# Altium PCB PoBoI.PcbDoc (part 1 of 4)
Units mm, origin at the board's own origin, x right, y up, seen from the top; angles counter-clockwise.
Board outline 90.25 x 95.8 mm, 4 copper layers (Top Layer, GND Layer, PWR Layer, Bottom Layer), stack 1.537 mm thick; 250 components, 177 nets, 942 pads, 25 vias.
Unrouted connection lines stored in the file: 192.
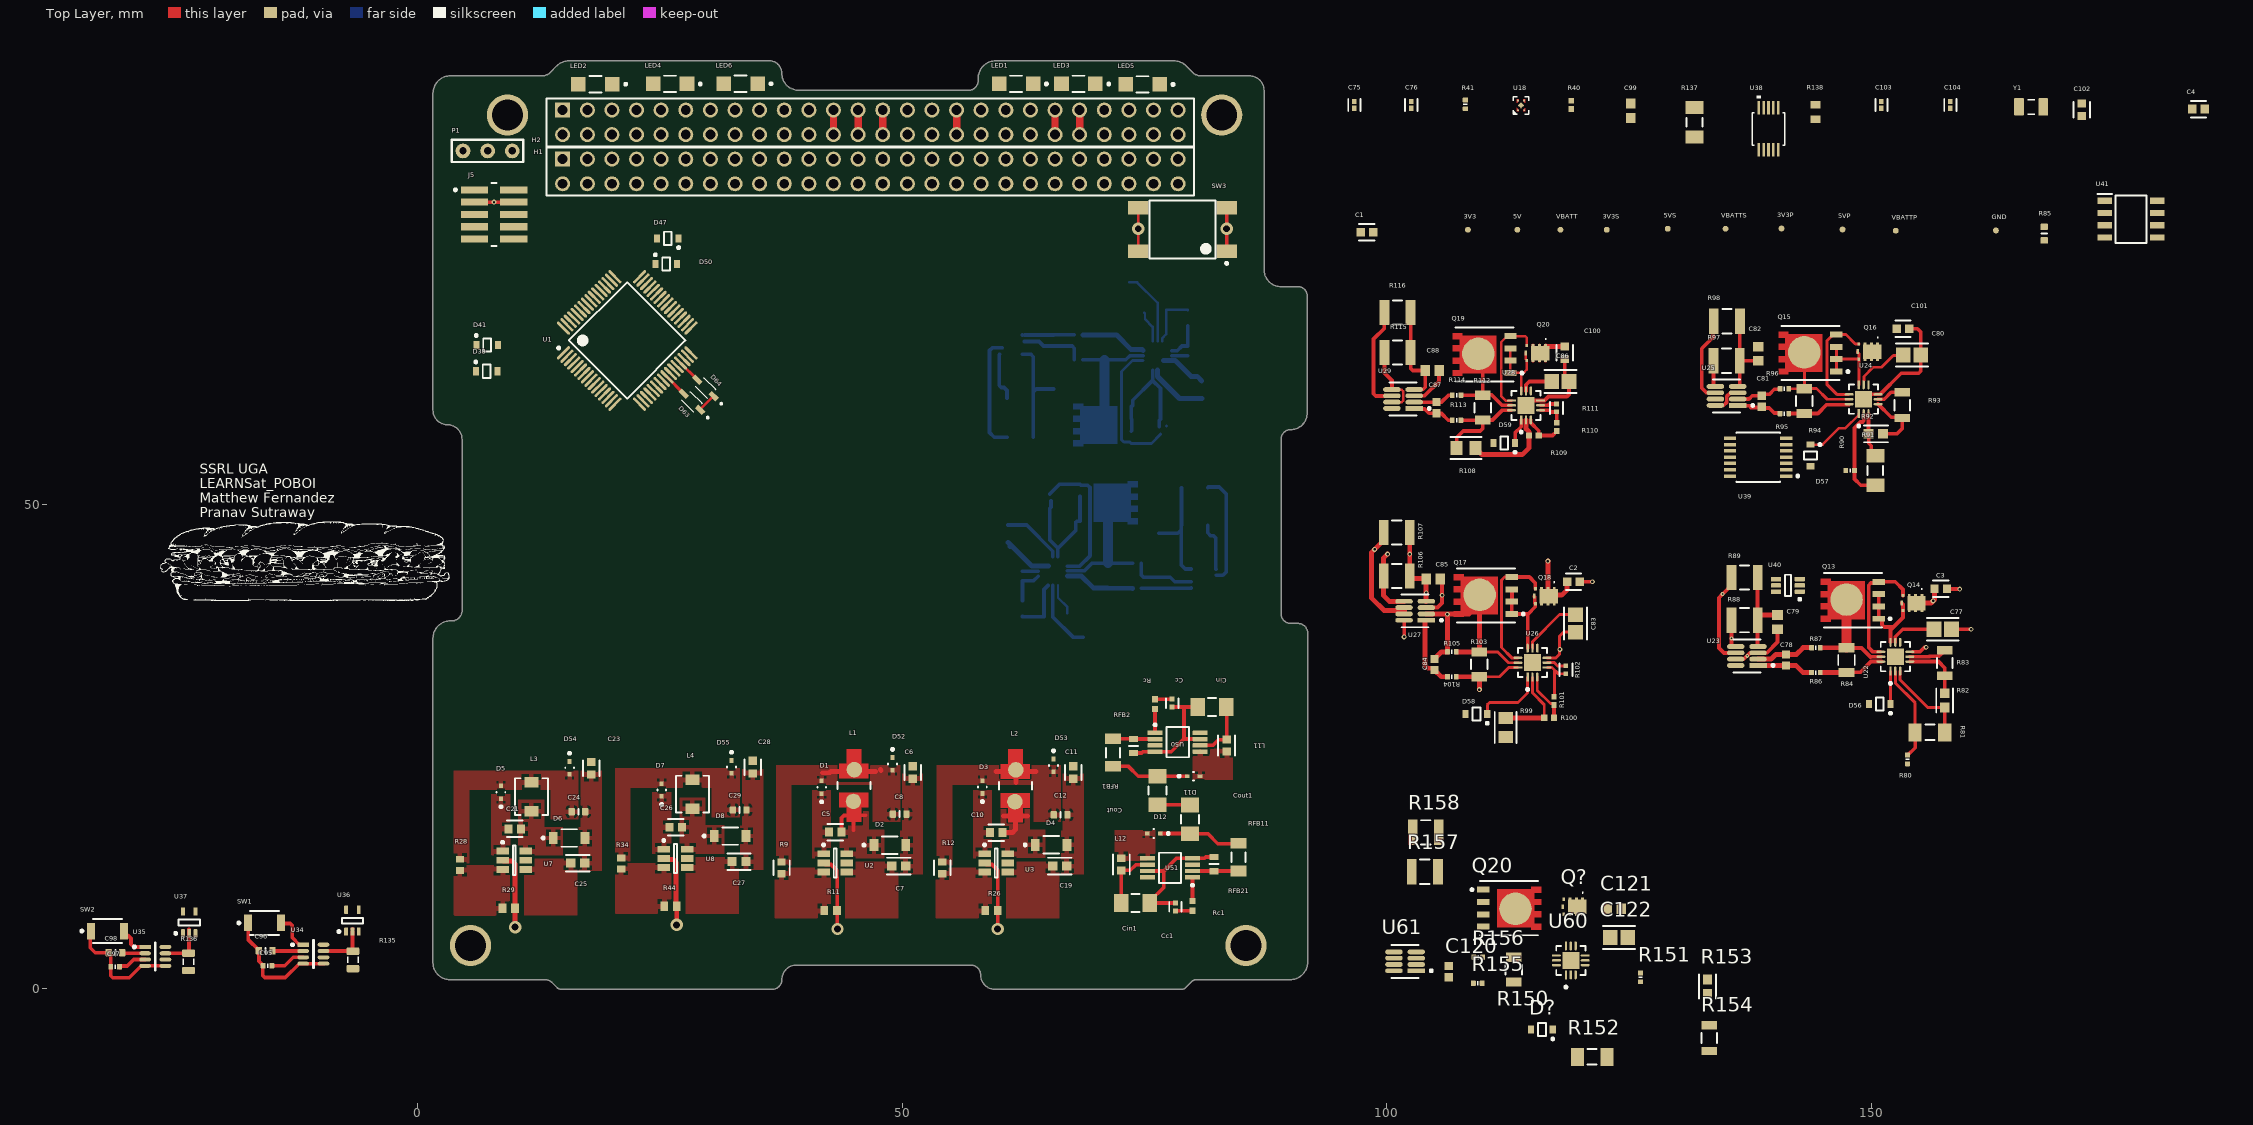
[diagram p0: Top Layer view]
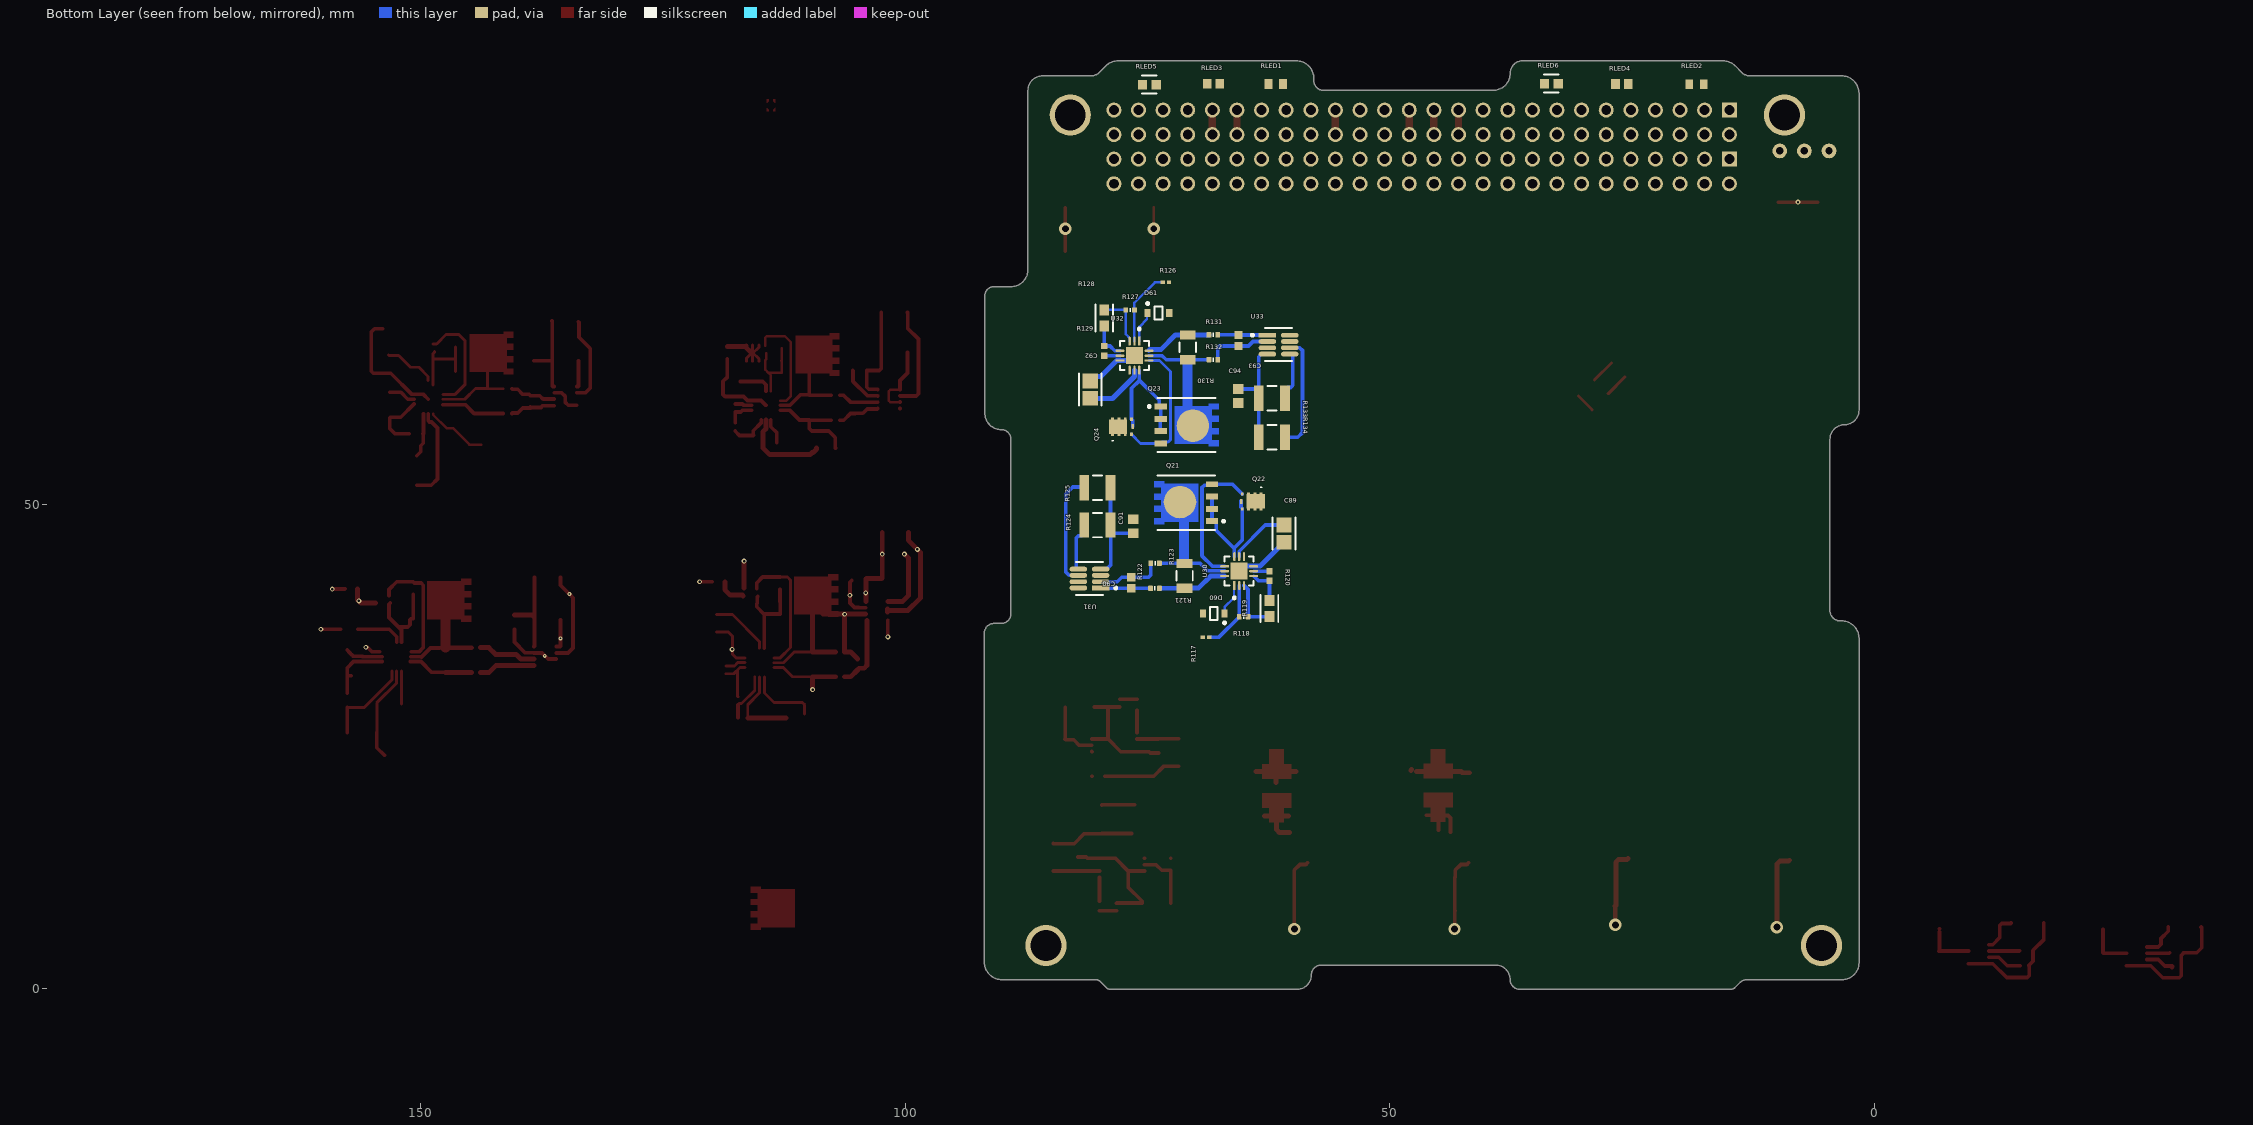
[diagram p1: Bottom Layer view, seen from below]
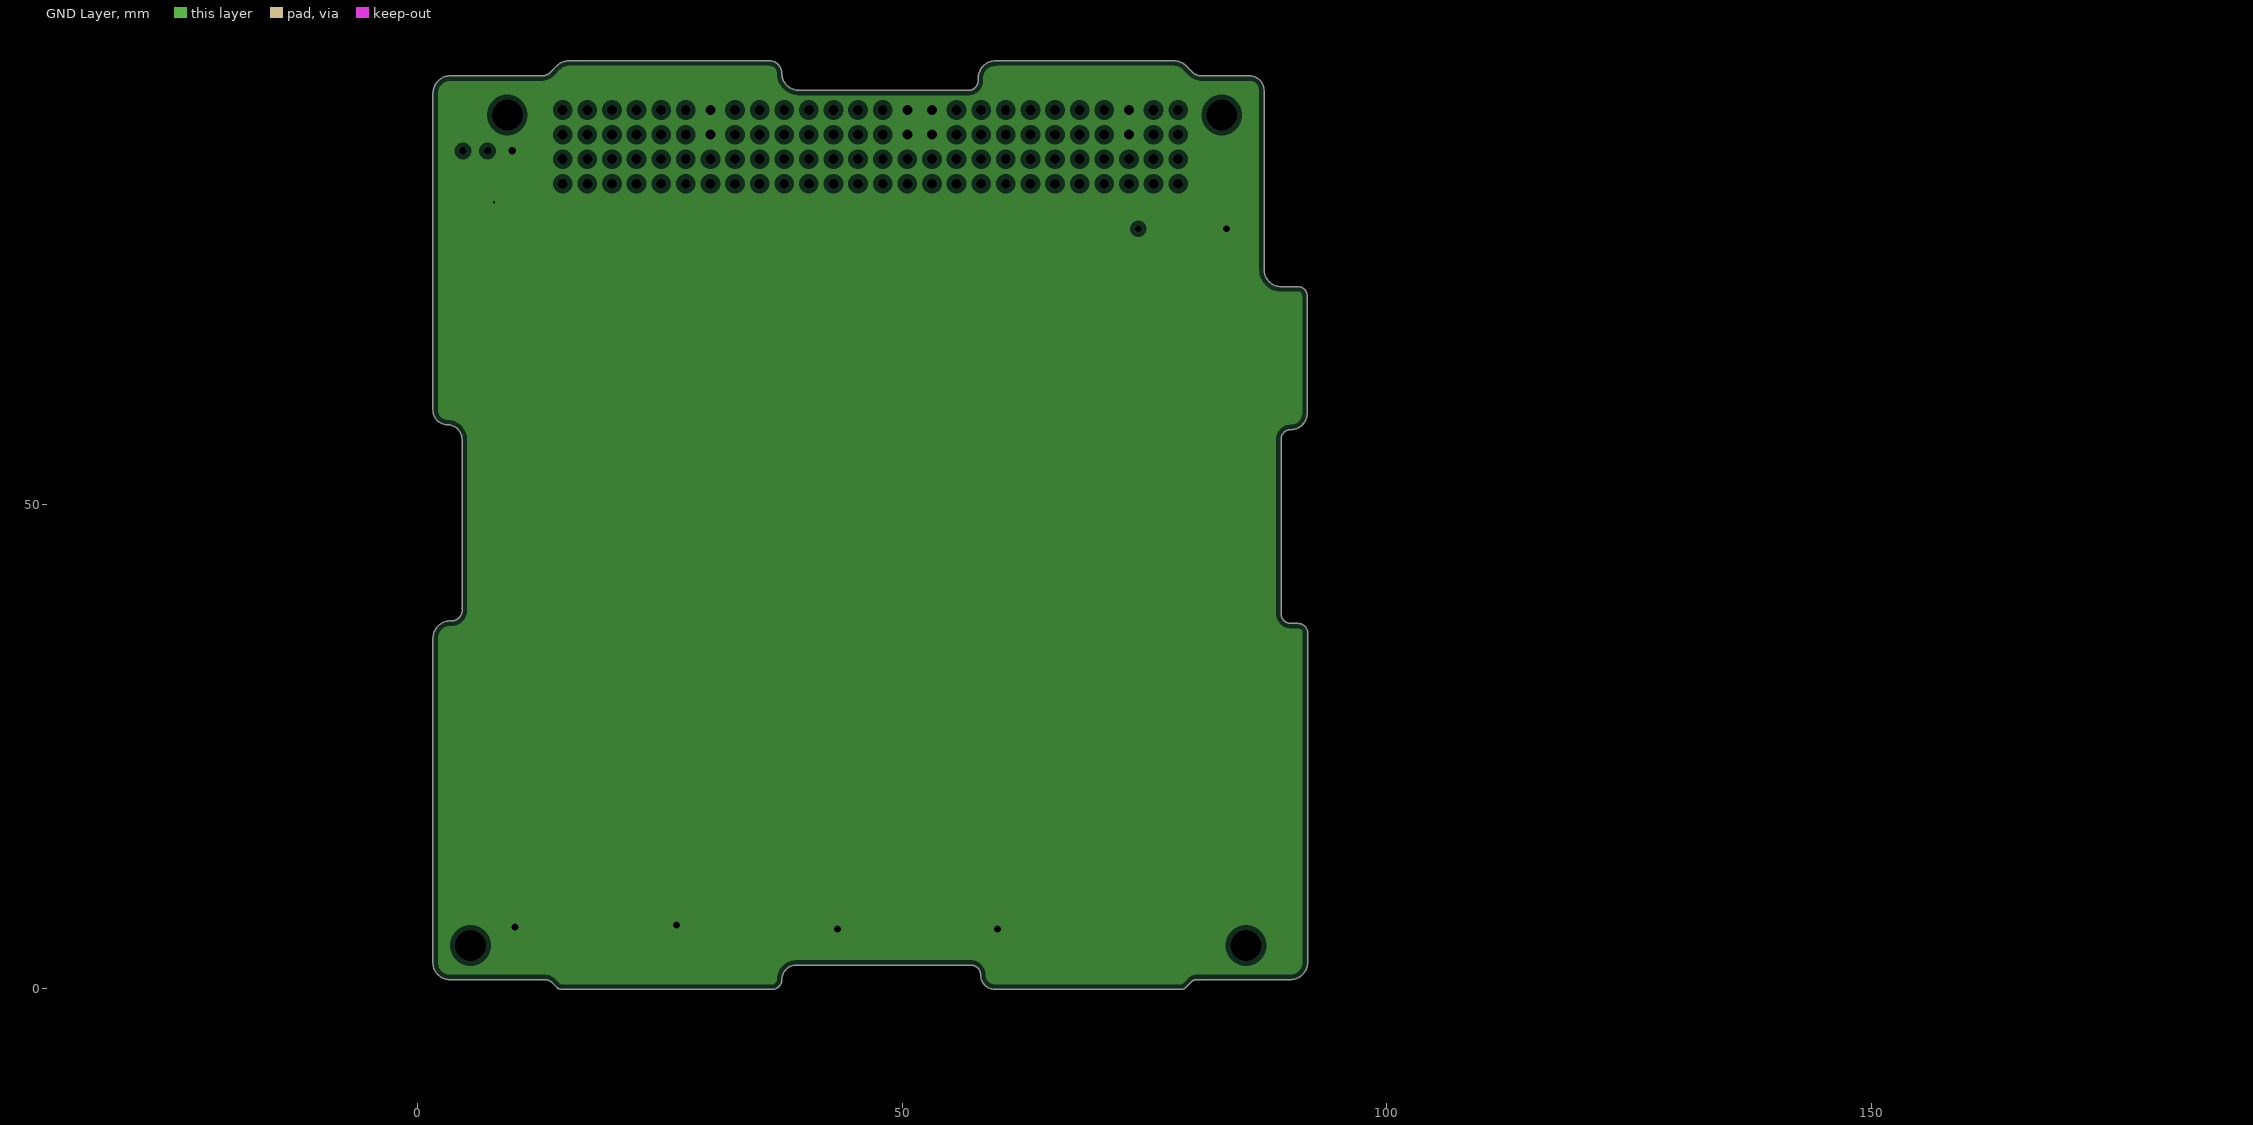
[diagram p2: GND Layer, clearances drawn from the general rule]
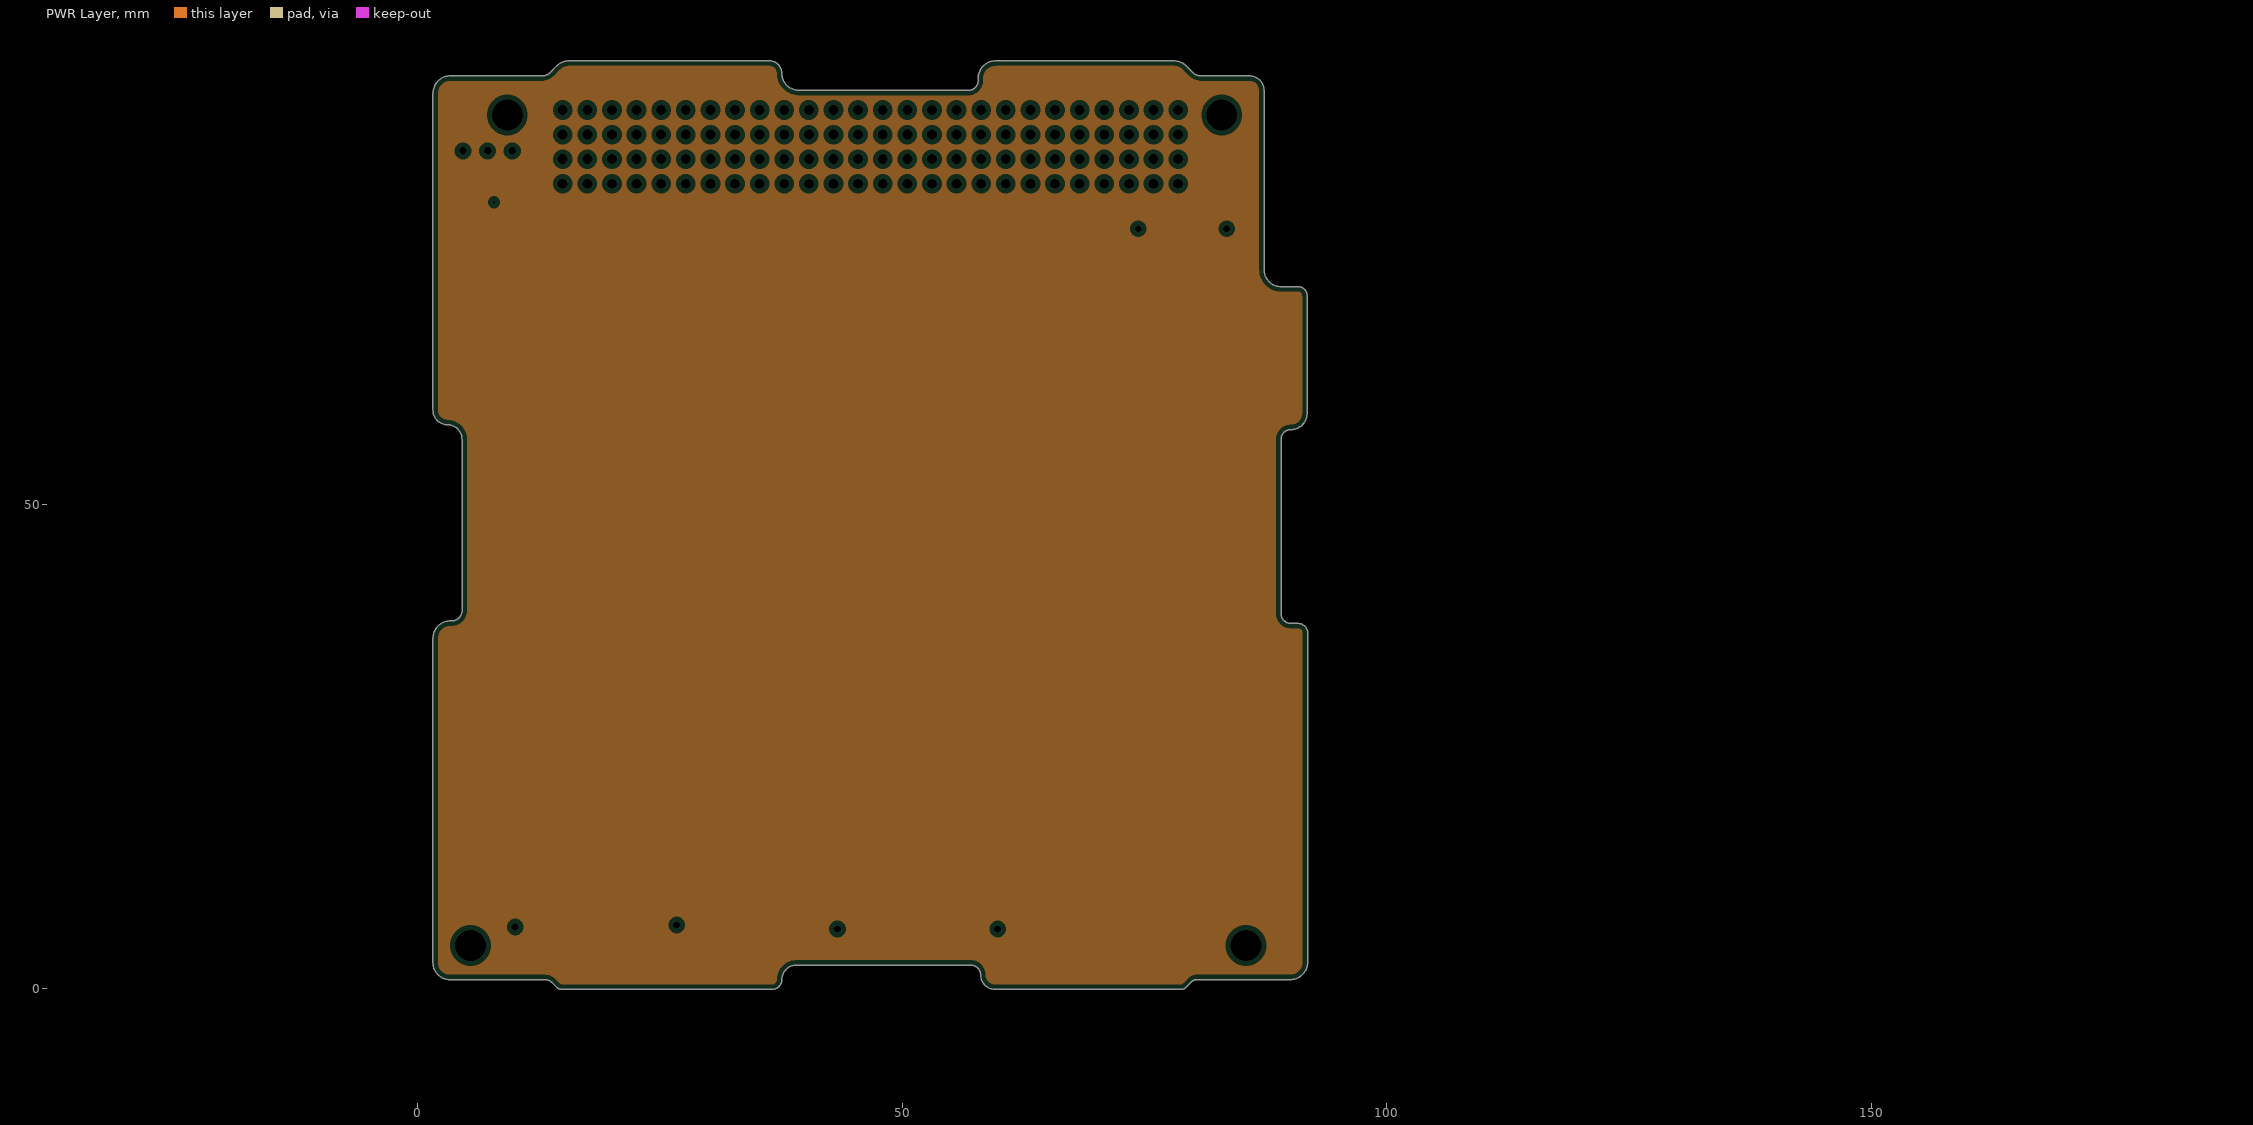
[diagram p3: PWR Layer, clearances drawn from the general rule]

## Layer stack, top to bottom
Top Solder: solder mask 0.0102, Solder Resist, Dk 3.5
Top Layer: signal copper 0.035
Dielectric 2: prepreg 0.1905, PP-006, Dk 4.1
GND Layer: plane copper 0.035, net GND
Dielectric 1: dielectric 1.016, FR-4, Dk 4.8
PWR Layer: plane copper 0.035
Dielectric 3: prepreg 0.1905, PP-006, Dk 4.1
Bottom Layer: signal copper 0.035
Bottom Solder: solder mask 0.0102, Solder Resist, Dk 3.5

## Board outline
1.601,2.709 ccw(c3.351,2.709) 3.351,0.959 13.101,0.959 cw(c13.101,-0.206) 13.925,0.617 14.395,0.148 ccw(c14.851,0.604) 14.851,-0.041 36.601,-0.041 ccw(c36.601,0.959) 37.601,0.959 cw(c39.101,0.959) 39.101,2.459 57.101,2.459 cw(c57.101,1.459) 58.101,1.459 ccw(c59.601,1.459) 59.601,-0.041 78.851,-0.041 ccw(c78.851,0.562) 79.278,0.135 79.925,0.782 cw(c80.351,0.355) 80.351,0.959 90.048,0.959 ccw(c90.048,2.762) 91.851,2.762 91.851,36.709 ccw(c90.851,36.709) 90.851,37.709 90.101,37.709 cw(c90.101,38.709) 89.101,38.709 89.101,56.709 cw(c90.101,56.709) 90.101,57.709 ccw(c90.101,59.409) 91.801,59.409 91.801,71.508 ccw(c90.851,71.508) 90.851,72.459 89.101,72.459 cw(c89.101,74.209) 87.351,74.209 87.351,92.709 ccw(c85.851,92.709) 85.851,94.209 80.851,94.209 cw(c80.851,95.416) 79.998,94.562 79.329,95.231 ccw(c78.054,93.955) 78.054,95.759 76.602,95.759 60.061,95.759 59.655,95.752 ccw(c59.655,93.949) 57.851,93.949 57.851,93.709 cw(c56.851,93.709) 56.851,92.709 39.351,92.709 cw(c39.351,94.459) 37.601,94.459 ccw(c36.301,94.459) 36.301,95.759 15.603,95.759 ccw(c15.604,94.063) 14.404,95.261 13.705,94.562 cw(c12.851,95.416) 12.851,94.209 3.405,94.209 ccw(c3.405,92.405) 1.601,92.405 1.601,59.709 ccw(c3.101,59.709) 3.101,58.209 cw(c3.101,56.709) 4.601,56.709 4.601,39.027 cw(c3.55,39.027) 3.55,37.975 3.405,37.975 ccw(c3.405,36.172) 1.601,36.172

## Design rules (kind name [scope] priority, off if disabled: settings)
BoardOutlineClearance [All] p1: gap=0.2 ignorepadtopadclearanceinfootprint=FALSE except(0.4: Arc-SplitBarrior Arc-SplitContinuation Track-SplitBarrior Track-SplitContinuation SMDPad-SplitBarrior SMDPad-SplitContinuation THPad-SplitBarrior THPad-SplitContinuation Via-SplitBarrior Via-SplitContinuation Fill-SplitBarrior Fill-SplitContinuation Poly-SplitBarrior Poly-SplitContinuation Region-SplitBarrior Region-SplitContinuation Text-SplitBarrior Text-SplitContinuation)
Clearance "Clearance Top Layer" [OnLayer('Top Layer')] p1: gap=0.203 ignorepadtopadclearanceinfootprint=TRUE except(0.254: Arc-Text Track-Text SMDPad-Text THPad-Text Via-Text Fill-Text Poly-Text Region-Text Text-Text)
Clearance "Clearance Bottom Layer" [OnLayer('Bottom Layer')] p2: gap=0.203 ignorepadtopadclearanceinfootprint=TRUE except(0.254: Arc-Text Track-Text SMDPad-Text THPad-Text Via-Text Fill-Text Poly-Text Region-Text Text-Text)
Clearance [All] p3: gap=0.2 ignorepadtopadclearanceinfootprint=FALSE except(0.089: Arc-Arc Arc-Track Arc-SMDPad Track-Track Track-SMDPad SMDPad-SMDPad; 0.127: Arc-Via Track-Via SMDPad-Via THPad-Via Via-Via; 0.254: Arc-Text Track-Text SMDPad-Text THPad-Text Via-Text Fill-Text Poly-Text Region-Text Text-Text)
FanoutControl Fanout_Small [(CompPinCount < 5)] p1: bgadir=Out bgaviamode=Centered fanoutstyle=Auto fanoutdirection=OutThenIn viagrid=0.025 // Fanout_Small (Default Rule)
FanoutControl Fanout_Default [All] p2: bgadir=Out bgaviamode=Centered fanoutstyle=Auto fanoutdirection=Alternating viagrid=0.025 // Fanout_Default (Default Rule)
FanoutControl Fanout_BGA [IsBGA] p3: bgadir=Out bgaviamode=Centered fanoutstyle=Auto fanoutdirection=Alternating viagrid=0.025 // Fanout_BGA (Default Rule)
FanoutControl Fanout_LCC [IsLCC] p4: bgadir=Out bgaviamode=Centered fanoutstyle=Auto fanoutdirection=Alternating viagrid=0.025 // Fanout_LCC (Default Rule)
FanoutControl Fanout_SOIC [IsSOIC] p5: bgadir=Out bgaviamode=Centered fanoutstyle=Auto fanoutdirection=Alternating viagrid=0.025 // Fanout_SOIC (Default Rule)
HoleSize [All] p1: absolutevalues=TRUE maxlimit=6.3 minlimit=0.2 maxpercent=80.000 minpercent=20.000
MinimumAnnularRing [All] p1: minimumring=0.076
MinimumSolderMaskSliver [All] p1: minsoldermaskwidth=0.1
PlaneClearance [All] p1: clearance=0.508
PlaneConnect [All] p1: planeconnectstyle=Relief reliefexpansion=0.508 reliefentries=4 reliefconductorwidth=0.254 reliefairgap=0.254
PolygonConnect PolygonConnect_1 [All] p1: thpad.connectstyle=Relief thpad.reliefconductorwidth=0.508 thpad.reliefentries=4 thpad.polygonreliefangle="90 Angle" thpad.airgapwidth=0.254 smdpad.connectstyle=Relief smdpad.reliefconductorwidth=0.508 smdpad.reliefentries=4 smdpad.polygonreliefangle="90 Angle" smdpad.airgapwidth=0.254 via.connectstyle=Direct via.reliefconductorwidth=0.508 via.reliefentries=4 via.polygonreliefangle="90 Angle" via.airgapwidth=0.254
RoutingCorners [All] p1: cornerstyle=Round minsetback=2.54 maxsetback=2.54
RoutingVias [All] p1: holewidth=0.5 width=1 viastyle="Through Hole" minholewidth=0.2 minwidth=0.45 maxholewidth=1 maxwidth=2
SilkToSilkClearance [All] p1: silktosilkclearance=0.1
SilkToSolderMaskClearance [IsPad] p1: minsilkscreentomaskgap=0.1 clearancetoexposedcopper=TRUE
SolderMaskExpansion [All] p1: expansion=0.102 istentingtop=FALSE
SupplyNets "Schematic Supply Nets" [InNet('GND')] p1: voltage=0.000
Width [All] p1: maxlimit=2.54 minlimit=0.089 preferedwidth=0.381 minimp=50.000000 maximp=50.000000 favimp=50.000000
18 further rules are at their usual default settings.

## Classes and differential pairs
component class 12VPrimary: C120 C121 C122 D? Q20 Q? R150 R151 R152 R153 R154 R155 R156 R157 R158 U60 U61
component class 12V_BOOST: Cc Cc1 Cin Cin1 Cout Cout1 D11 D12 L11 L12 Rc Rc1 RFB1 RFB2 RFB11 RFB21 U50 U51
component class WatchDog: C95 C96 C97 C98 CM4WDRST R135 R136 STMWDRST SW1 SW2 U34 U35 U36 U37
component class VBATTSecondary: C92 C93 C94 D61 Q23 Q24 R126 R127 R128 R129 R130 R131 R132 R133 R134 U32 U33
component class VBATTPrimary: C89 C90 C91 D60 Q21 Q22 R117 R118 R119 R120 R121 R122 R123 R124 R125 U30 U31
component class MemoryLatch: U40
component class 5VSecondary: C80 C81 C82 D57 Q15 Q16 R90 R91 R92 R93 R94 R95 R96 R97 R98 U24 U25
component class 5VPrimary: C77 C78 C79 D56 Q13 Q14 R80 R81 R82 R83 R84 R86 R87 R88 R89 U22 U23
component class 3V3Secondary: C86 C87 C88 D59 Q19 Q20 R108 R109 R110 R111 R112 R113 R114 R115 R116 U28 U29
component class 3V3Primary: C83 C84 C85 D58 Q17 Q18 R99 R100 R101 R102 R103 R104 R105 R106 R107 U26 U27
component class STM32: C2 C3 C4 C75 C76 C99 C100 C101 C102 C103 C104 D63 D64 R40 R41 R85 R137 R138 U1 U18 U38 U39 U41 Y1
component class 3V3_Buck: C21 C23 C24 C25 C26 C27 C28 C29 D5 D6 D7 D8 D54 D55 L3 L4 R28 R29 R34 R44 U7 U8
component class 5V_Buck: C5 C6 C7 C8 C10 C11 C12 C19 D1 D2 D3 D4 D52 D53 L1 L2 R9 R11 R12 R26 U2 U3
component class TVS_Diodes: D38 D41 D47 D50
component class PC104: 3V3 5V C1 GND H1 H2 J5 LED1 LED2 LED3 LED4 LED5 LED6 P1 RLED1 RLED2 RLED3 RLED4 RLED5 RLED6 SW3 VBATT VBATTP VBATTS

## Components (designator, comment, footprint, x,y, rotation, side; value= is the part's Value field where it differs from the comment)
3V3 "TPAD6R" TP06R 108.382,78.334 r90 top
3V3P "TPAD6R" TP06R 140.741,78.461 r90 top
3V3S "TPAD6R" TP06R 122.707,78.334 r90 top
5V "TPAD6R" TP06R 113.487,78.334 r90 top
5VP "TPAD6R" TP06R 147.041,78.359 r90 top
5VS "TPAD6R" TP06R 129.007,78.435 r90 top
C1 "0.1uF" FP-C0603-CJ-MFG#1 97.968,78.08 r0 top value=100nF
C2 "0.1uF" FP-C0603-CJ-MFG#1 119.278,42.012 r0 top value=100nF
C3 "0.1uF" FP-C0603-CJ-MFG#2 157.175,41.275 r0 top value=100nF
C4 "0.1uF" FP-C0603-CJ-MFG#1 183.769,90.78 r0 top value=100nF
C5 "0.1uF" FP-C0603-CJ-MFG#1 43.104,16.18 r0 top value=100nF
C6 "0.1uF" FP-C0603-CJ-MFG#1 51.105,22.327 r270 top value=100nF
C7 "1uF" FP-CL10-IPC_B 49.667,12.675 r0 top
C8 "Capacitor 10µF +/-20% 10V 0603" CAPC0603(1608)100_L 49.759,18.034 r180 top value=10uF
C10 "0.1uF" FP-C0603-CJ-MFG#1 59.715,16.129 r0 top value=100nF
C11 "0.1uF" FP-C0603-CJ-MFG#1 67.666,22.327 r270 top value=100nF
C12 "Capacitor 10µF +/-20% 10V 0603" CAPC0603(1608)100_L 66.37,17.958 r180 top value=10uF
C19 "1uF" FP-CL10-IPC_B 66.269,12.675 r0 top
C21 "0.1uF" FP-C0603-CJ-MFG#1 10.033,16.51 r0 top value=100nF
C23 "0.1uF" FP-C0603-CJ-MFG#1 17.932,22.758 r270 top value=100nF
C24 "Capacitor 10µF +/-20% 10V 0603" CAPC0603(1608)100_L 16.612,18.288 r180 top value=10uF
C25 "1uF" FP-CL10-IPC_B 16.545,12.979 r0 top
C26 "0.1uF" FP-C0603-CJ-MFG#1 26.645,16.688 r0 top value=100nF
C27 "1uF" FP-CL10-IPC_B 33.182,13.132 r0 top
C28 "0.1uF" FP-C0603-CJ-MFG#1 34.595,22.885 r270 top value=100nF
C29 "Capacitor 10µF +/-20% 10V 0603" CAPC0603(1608)100_L 33.249,18.466 r180 top value=10uF
C75 "CC0201KRX5R5BB105" FP-CC0201-BA-IPC_A 96.672,91.211 r90 top value=1µF
C76 "CC0201KRX5R5BB105" FP-CC0201-BA-IPC_A 102.54,91.211 r90 top value=1µF
C77 "C0805C184K5RACTU" FP-C0805C-DN-IPC_A 157.378,37.109 r0 top value=180nF
C78 "Capacitor 1 uF +/- 10% 25 V 0603" CAPC1608X90X40LL10T20 141.202,33.935 r270 top value=1µF
C79 "Capacitor 1uF +/- 10% 16V 0603" CAPC1608X90X35ML15T15 140.335,37.846 r270 top value=1µF
C80 "C0805C184K5RACTU" FP-C0805C-DN-IPC_A 154.215,65.405 r0 top value=180nF
C81 "Capacitor 1 uF +/- 10% 25 V 0603" CAPC1608X90X40LL10T20 138.709,60.63 r270 top value=1µF
C82 "Capacitor 1uF +/- 10% 16V 0603" CAPC1608X90X35ML15T15 138.328,65.532 r90 top value=1µF
C83 "C0805C184K5RACTU" FP-C0805C-DN-IPC_A 119.482,37.719 r270 top value=180nF
C84 "Capacitor 1 uF +/- 10% 25 V 0603" CAPC1608X90X40LL10T20 104.941,33.477 r270 top value=1µF
C85 "Capacitor 1uF +/- 10% 16V 0603" CAPC1608X90X35ML15T15 104.8,42.291 r0 top value=1µF
C86 "C0805C184K5RACTU" FP-C0805C-DN-IPC_A 117.919,62.662 r0 top value=180nF
C87 "Capacitor 1 uF +/- 10% 25 V 0603" CAPC1608X90X40LL10T20 105.156,59.969 r270 top value=1µF
C88 "Capacitor 1uF +/- 10% 16V 0603" CAPC1608X90X35ML15T15 104.699,63.805 r0 top value=1µF
C89 "C0805C184K5RACTU" FP-C0805C-DN-IPC_A 60.935,46.965 r270 bottom value=180nF
C90 "Capacitor 1 uF +/- 10% 25 V 0603" CAPC1608X90X40LL10T20 76.683,41.91 r270 bottom value=1µF
C91 "Capacitor 1uF +/- 10% 16V 0603" CAPC1608X90X35ML15T15 76.479,47.727 r90 bottom value=1µF
C92 "C0805C184K5RACTU" FP-C0805C-DN-IPC_A 80.924,61.824 r90 bottom value=180nF
C93 "Capacitor 1 uF +/- 10% 25 V 0603" CAPC1608X90X40LL10T20 65.634,66.904 r90 bottom value=1µF
C94 "Capacitor 1uF +/- 10% 16V 0603" CAPC1608X90X35ML15T15 65.659,61.175 r270 bottom value=1µF
C95 "Capacitor 2,2µF +/-20% 10V 0402" CAPC0402(1005)60_L -15.469,2.388 r0 top value=2.2µF
C96 "Capacitor 1µF +/-40% 50V 0603" CAPC0603(1608)100_L -15.661,3.937 r180 top value=1µF
C97 "Capacitor 2,2µF +/-20% 10V 0402" CAPC0402(1005)60_L -31.191,2.286 r0 top value=2.2µF
C98 "Capacitor 1µF +/-40% 50V 0603" CAPC0603(1608)100_L -31.166,3.734 r180 top value=1µF
C99 "Capacitor 1 uF +/- 10% 16 V 0603" CAPC1608X94X35NL15T15 125.197,90.602 r90 top value=1µF
C100 "0.1uF" FP-C0603-CJ-MFG#3 118.364,65.634 r270 top value=100nF
C101 "0.1uF" FP-C0603-CJ-MFG#1 153.279,68.123 r0 top value=100nF
C102 "0.1uF" FP-C0603-CJ-MFG#1 171.729,90.703 r90 top value=100nF
C103 "GRM0335C1E100JA01D" FP-GRM033-0_03-IPC_A 151.054,91.211 r90 top
C104 "GRM0335C1E100JA01D" FP-GRM033-0_03-IPC_A 158.166,91.211 r90 top
C120 "Capacitor 1 uF +/- 10% 25 V 0603" CAPC1608X90X40LL10T20 106.401,1.778 r270 top value=1µF
C121 "Capacitor 1uF +/- 10% 16V 0603" CAPC1608X90X35ML15T15 123.495,8.28 r0 top value=1µF
C122 "C0805C184K5RACTU" FP-C0805C-DN-IPC_A 123.977,5.309 r180 top value=180nF
Cc "2.2nF" FP-C0402-BB-MFG 77.876,29.489 r270 top value="2,200 pF"
Cc1 "2.2nF" FP-C0402-BB-MFG 78.207,8.458 r90 top value="2,200 pF"
Cin "22uF" FP-CL31-IPC_A 81.991,29.083 r180 top
Cin1 "22uF" FP-CL31-IPC_A 74.089,8.865 r0 top
Cout "22uF" FP-CL31-IPC_A 76.352,20.472 r270 top
Cout1 "22uF" FP-CL31-IPC_A 79.731,17.501 r90 top
D1 "1N914BWT" FP-502-01-MFG 41.707,20.803 r90 top value=4pF
D2 "MBR0530" FP-425-04-MFG 48.743,14.834 r0 top
D3 "1N914BWT" FP-502-01-MFG 58.293,20.828 r90 top value=4pF
D4 "MBR0530" FP-425-04-MFG 65.38,14.859 r0 top
D5 "1N914BWT" FP-502-01-MFG 8.611,20.295 r90 top value=4pF
D6 "MBR0530" FP-425-04-MFG 15.646,15.57 r0 top
D7 "1N914BWT" FP-502-01-MFG 25.197,20.523 r90 top value=4pF
D8 "MBR0530" FP-425-04-MFG 32.258,15.773 r0 top
D11 "1N914BWT" FP-502-01-MFG 80.086,21.946 r0 top value=4pF
D12 "1N914BWT" FP-502-01-MFG 75.971,16.027 r180 top value=4pF
D38 "MM3Z3V6T1G" ONSC-SOD-323-2-477-02_V 7.137,63.729 r0 top
D41 "MM3Z3V6T1G" ONSC-SOD-323-2-477-02_V 7.188,66.446 r0 top
D47 "MM3Z3V6T1G" ONSC-SOD-323-2-477-02_V 25.832,77.445 r180 top
D50 "MM3Z3V6T1G" ONSC-SOD-323-2-477-02_V 25.657,74.778 r0 top
D52 "1N914BWT" FP-502-01-MFG 49.022,23.216 r270 top value=4pF
D53 "1N914BWT" FP-502-01-MFG 65.634,23.063 r270 top value=4pF
D54 "1N914BWT" FP-502-01-MFG 15.697,22.809 r270 top value=4pF
D55 "1N914BWT" FP-502-01-MFG 32.41,22.911 r270 top value=4pF
D56 "MM3Z3V6T1G" ONSC-SOD-323-2-477-02_V 150.876,29.413 r180 top
D57 "MM3Z3V6T1G" ONSC-SOD-323-2-477-02_V 143.739,55.042 r270 top
D58 "MM3Z3V6T1G" ONSC-SOD-323-2-477-02_V 109.271,28.372 r180 top
D59 "MM3Z3V6T1G" ONSC-SOD-323-2-477-02_V 112.141,56.337 r180 top
D60 "MM3Z3V6T1G" ONSC-SOD-323-2-477-02_V 68.174,38.735 r0 bottom
D61 "MM3Z3V6T1G" ONSC-SOD-323-2-477-02_V 73.891,69.748 r180 bottom
D63 "1N4148WX-TP" 1N4148WX-TP-Footprint-1 28.321,60.579 r135 top
D64 "1N4148WX-TP" 1N4148WX-TP-Footprint-1 29.718,62.008 r135 top
D? "MM3Z3V6T1G" ONSC-SOD-323-2-477-02_V 116.027,-4.191 r180 top
GND "TPAD6R" TP06R 162.865,78.257 r90 top
H1 "SSQ-126-22-G-D" SMTC-SSQ-126-22-X-D 14.986,85.611 r0 top
H2 "SSQ-126-22-G-D" SMTC-SSQ-126-22-X-D 14.986,90.678 r0 top
J5 "FTSH-105-01-L-DV-K-P-TR" FP-FTSH-105-01-L-DV-K-P-T-MFG 7.899,79.905 r270 top
L1 "15uH" FP-LQH43CN_03-MFG 45.034,20.98 r90 top
L2 "15uH" FP-LQH43CN_03-MFG 61.697,20.955 r90 top
L3 "PA4547.103NLT" INDM3532X15N 11.76,19.836 r90 top
L4 "PA4547.103NLT" INDM3532X15N 28.372,20.093 r90 top
L11 "10uH" FP-MLZ1608-IPC_C 83.49,25.121 r270 top
L12 "10uH" FP-MLZ1608-IPC_C 72.619,12.852 r90 top
LED1 "HSMS-C150" FP-HSMS-C150-MFG 61.773,93.37 r180 top
LED2 "HSMS-C150" FP-HSMS-C150-MFG 18.364,93.345 r180 top
LED3 "HSMS-C150" FP-HSMS-C150-MFG 68.202,93.37 r180 top
LED4 "HSMS-C150" FP-HSMS-C150-MFG 26.06,93.37 r180 top
LED5 "HSMS-C150" FP-HSMS-C150-MFG 74.831,93.32 r180 top
LED6 "HSMS-C150" FP-HSMS-C150-MFG 33.35,93.396 r180 top
P1 "22-28-4036" 22-28-4036-Footprint-1 8.128,85.827 r180 top
Q13 "SI7164DP-T1-GE3" Vishay_S17-0173-SINGLE_MFG 148.097,40.099 r180 top
Q14 "SI5418DU-T1-GE3" SI5418DU-T1-GE3-Footprint-1 154.503,39.941 r180 top
Q15 "SI7164DP-T1-GE3" Vishay_S17-0173-SINGLE_MFG 143.739,65.608 r180 top
Q16 "SI5418DU-T1-GE3" SI5418DU-T1-GE3-Footprint-1 149.944,65.888 r180 top
Q17 "SI7164DP-T1-GE3" Vishay_S17-0173-SINGLE_MFG 110.241,40.589 r180 top
Q18 "SI5418DU-T1-GE3" SI5418DU-T1-GE3-Footprint-1 116.57,40.652 r180 top
Q19 "SI7164DP-T1-GE3" Vishay_S17-0173-SINGLE_MFG 110.109,65.456 r180 top
Q20 "SI7164DP-T1-GE3" Vishay_S17-0173-SINGLE_MFG 112.649,8.331 r0 top
Q20 "SI5418DU-T1-GE3" SI5418DU-T1-GE3-Footprint-1 115.688,65.735 r180 top
Q21 "SI7164DP-T1-GE3" Vishay_S17-0173-SINGLE_MFG 71.018,50.165 r0 bottom
Q22 "SI5418DU-T1-GE3" SI5418DU-T1-GE3-Footprint-1 64.008,50.419 r0 bottom
Q23 "SI7164DP-T1-GE3" Vishay_S17-0173-SINGLE_MFG 70.978,58.184 r180 bottom
Q24 "SI5418DU-T1-GE3" SI5418DU-T1-GE3-Footprint-1 77.893,57.887 r180 bottom
Q? "SI5418DU-T1-GE3" SI5418DU-T1-GE3-Footprint-1 119.507,8.611 r180 top
R9 "35.7k" FP-CRCW0603-e3-IPC_C 37.567,12.497 r90 top
R11 "10k" RESC1609X50X30NL8T20 42.632,8.077 r180 top value=1K
R12 "35.7k" FP-CRCW0603-e3-IPC_C 54.153,12.497 r90 top
R26 "10k" RESC1609X50X30NL8T20 59.233,8.077 r180 top value=1K
R28 "22.1k" RESC1609X50X30LL10T20 4.394,12.802 r90 top
R29 "10k" RESC1609X50X30NL8T20 9.423,8.331 r180 top value=1K
R34 "22.1k" RESC1609X50X30LL10T20 21.031,12.945 r90 top
R40 "1.1k" RESC1005X40X25NL05T10 119.05,91.211 r90 top
R41 "3KR2F" RESC0402(1005)_L 108.128,91.262 r90 top value=3k
R44 "10k" RESC1609X50X30NL8T20 26.111,8.534 r180 top value=1K
R80 "768KR2F" RESC0402(1005)_L 153.746,23.673 r90 top value=768k
R81 "CRCW12067K50FKEA" FP-CRCW1206-e3-IPC_A 156.058,26.467 r0 top value=7.5k
R82 "PTN0603E8002BST1" FP-PTN0603-IPC_B 157.582,29.769 r90 top value=80k
R83 "RT1206FRE07150KL" FP-RT1206-IPC_C 157.582,33.63 r90 top value=150k
R84 "CSR1206FK25L0" FP-CSR1206-IPC_C 147.447,33.934 r90 top
R85 "120R3J" RESC0603(1608)_L 167.843,77.927 r90 top value=120
R86 "Resistor 10R  +/-1 % 0402 63 mW" RESC0402(1005)_L 144.297,32.639 r180 top value=10
R87 "Resistor 10R  +/-1 % 0402 63 mW" RESC0402(1005)_L 144.297,35.204 r180 top value=10
R88 "CRCW12103K30JNEA" FP-CRCW1210-e3-IPC_C 136.931,38.049 r180 top value=3.3k
R89 "CRCW12103K30JNEA" FP-CRCW1210-e3-IPC_C 136.931,42.443 r180 top value=3.3k
R90 "768KR2F" RESC0402(1005)_L 147.828,53.492 r0 top value=768k
R91 "CRCW12067K50FKEA" FP-CRCW1206-e3-IPC_A 150.419,53.49 r90 top value=7.5k
R92 "PTN0603E8002BST1" FP-PTN0603-IPC_B 150.47,57.277 r0 top value=80k
R93 "RT1206FRE07150KL" FP-RT1206-IPC_C 153.213,60.223 r90 top value=150k
R94 "CSR1206FK25L0" FP-CSR1206-IPC_C 143.104,60.655 r90 top
R95 "Resistor 10R  +/-1 % 0402 63 mW" RESC0402(1005)_L 141.039,59.36 r180 top value=10
R96 "Resistor 10R  +/-1 % 0402 63 mW" RESC0402(1005)_L 141.046,61.925 r180 top value=10
R97 "CRCW12103K30JNEA" FP-CRCW1210-e3-IPC_C 135.077,64.821 r180 top value=3.3k
R98 "CRCW12103K30JNEA" FP-CRCW1210-e3-IPC_C 135.103,68.885 r180 top value=3.3k
R99 "CR0805-FX-7323ELF" FP-CR0805-IPC_A 112.283,26.976 r90 top value=732k
R100 "Resistor 10k +/-1% 0402 100 mW" RESC1005X40X25ML05T05 116.764,27.965 r0 top value=10k
R101 "RC0402FR-0760K4L" RESC1005X40X25NL05T10 117.272,29.718 r90 top value=60.4k
R102 "ESR01MZPJ224" FP-ESR01-IPC_C 118.491,32.918 r90 top value=220k
R103 "CSR1206FK25L0" FP-CSR1206-IPC_C 109.576,33.477 r90 top
R104 "Resistor 10R  +/-1 % 0402 63 mW" RESC0402(1005)_L 106.731,32.207 r180 top value=10
R105 "Resistor 10R  +/-1 % 0402 63 mW" RESC0402(1005)_L 106.731,34.773 r180 top value=10
R106 "CRCW12103K30JNEA" FP-CRCW1210-e3-IPC_C 101.041,42.596 r180 top value=3.3k
R107 "CRCW12103K30JNEA" FP-CRCW1210-e3-IPC_C 101.041,47.092 r180 top value=3.3k
R108 "CR0805-FX-7323ELF" FP-CR0805-IPC_A 108.179,55.804 r0 top value=732k
R109 "Resistor 10k +/-1% 0402 100 mW" RESC1005X40X25ML05T05 115.197,57.099 r0 top value=10k
R110 "RC0402FR-0760K4L" RESC1005X40X25NL05T10 117.551,57.988 r90 top value=60.4k
R111 "ESR01MZPJ224" FP-ESR01-IPC_C 117.526,59.947 r90 top value=220k
R112 "CSR1206FK25L0" FP-CSR1206-IPC_C 109.931,59.969 r90 top
R113 "Resistor 10R  +/-1 % 0402 63 mW" RESC0402(1005)_L 107.213,58.674 r180 top value=10
R114 "Resistor 10R  +/-1 % 0402 63 mW" RESC0402(1005)_L 107.213,61.265 r180 top value=10
R115 "CRCW12103K30JNEA" FP-CRCW1210-e3-IPC_C 101.122,65.659 r180 top value=3.3k
R116 "CRCW12103K30JNEA" FP-CRCW1210-e3-IPC_C 101.122,69.799 r180 top value=3.3k
R117 "MC0201L6F8663SE" RESC0603X26X15NL03T05 68.986,36.297 r180 bottom value=866k
R118 "2D37KR2F" RESC0402(1005)_L 65.1,38.405 r180 bottom value=2.37k
R119 "CR0603-FX-3742ELF" FP-CR0603-IPC_A 62.433,39.243 r90 bottom value=37.4k
R120 "Resistor 100k +/-1% 0402 100 mW" RESC1005X40X25ML05T05 62.433,42.604 r90 bottom value=100k
R121 "CSR1206FK25L0" FP-CSR1206-IPC_C 71.196,42.621 r90 bottom
R122 "Resistor 10R  +/-1 % 0402 63 mW" RESC0402(1005)_L 74.244,41.326 r0 bottom value=10
R123 "Resistor 10R  +/-1 % 0402 63 mW" RESC0402(1005)_L 74.237,43.917 r0 bottom value=10
R124 "CRCW12103K30JNEA" FP-CRCW1210-e3-IPC_C 80.188,47.854 r0 bottom value=3.3k
R125 "CRCW12103K30JNEA" FP-CRCW1210-e3-IPC_C 80.188,51.714 r0 bottom value=3.3k
R126 "MC0201L6F8663SE" RESC0603X26X15NL03T05 73.127,72.898 r0 bottom value=866k
R127 "2D37KR2F" RESC0402(1005)_L 76.81,70.053 r0 bottom value=2.37k
R128 "CR0603-FX-3742ELF" FP-CR0603-IPC_A 79.477,69.215 r270 bottom value=37.4k
R129 "Resistor 100k +/-1% 0402 100 mW" RESC1005X40X25ML05T05 79.477,65.837 r270 bottom value=100k
R130 "CSR1206FK25L0" FP-CSR1206-IPC_C 70.866,66.192 r270 bottom
R131 "Resistor 10R  +/-1 % 0402 63 mW" RESC0402(1005)_L 68.224,67.488 r180 bottom value=10
R132 "Resistor 10R  +/-1 % 0402 63 mW" RESC0402(1005)_L 68.224,64.922 r180 bottom value=10
R133 "CRCW12103K30JNEA" FP-CRCW1210-e3-IPC_C 62.179,60.935 r180 bottom value=3.3k
R134 "CRCW12103K30JNEA" FP-CRCW1210-e3-IPC_C 62.179,56.921 r180 bottom value=3.3k
R135 "1KR5J" RESC0805(2012)_L -6.655,2.997 r90 top value=1k
R136 "1KR5J" RESC0805(2012)_L -23.622,2.794 r90 top value=1k
R137 "Resistor 100k +/-1% 1206 250 mW" RESC3216X60X45ML15T20 131.75,89.408 r90 top value=100k
R138 "Resistor 10k +/-1% 0603 100 mW" RESC1608X55X25ML10T15 144.247,90.475 r90 top value=10k
R150 "CSR1206FK25L0" FP-CSR1206-IPC_C 113.106,1.981 r90 top
R151 "768KR2F" RESC0402(1005)_L 126.187,1.194 r90 top value=768k
R152 "CRCW12067K50FKEA" FP-CRCW1206-e3-IPC_A 121.209,-7.01 r0 top value=7.5k
R153 "PTN0603E8002BST1" FP-PTN0603-IPC_B 133.096,0.229 r90 top value=80k
R154 "RT1206FRE07150KL" FP-RT1206-IPC_C 133.274,-5.08 r90 top value=150k
R155 "Resistor 10R  +/-1 % 0402 63 mW" RESC0402(1005)_L 109.398,0.584 r180 top value=10
R156 "Resistor 10R  +/-1 % 0402 63 mW" RESC0402(1005)_L 109.449,3.277 r0 top value=10
R157 "CRCW12103K30JNEA" FP-CRCW1210-e3-IPC_C 103.937,12.09 r180 top value=3.3k
R158 "CRCW12103K30JNEA" FP-CRCW1210-e3-IPC_C 104.038,16.154 r180 top value=3.3k
Rc "24kOhms" RESC1005X40X25ML05T05 76.098,29.388 r90 top
Rc1 "24kOhms" RESC1005X40X25ML05T05 79.959,8.56 r270 top
RFB1 "64.9kOhms" RESC3216X70X50NL05T20 71.78,24.384 r270 top
RFB2 "7.5kOhms" FP-ERJ3EK-MFG 73.889,25.07 r270 top
RFB11 "64.9kOhms" RESC3216X70X50NL05T20 84.734,13.589 r90 top
RFB21 "7.5kOhms" FP-ERJ3EK-MFG 82.194,12.878 r90 top
RLED1 "150" RESC1608X55X25ML10T15 61.785,93.37 r0 bottom
RLED2 "150" RESC1608X55X25ML10T15 18.376,93.345 r0 bottom
RLED3 "240" RESC1608X55X30NL20T20 68.199,93.396 r0 bottom
RLED4 "240" RESC1608X55X30NL20T20 26.071,93.37 r0 bottom
RLED5 "430" FP-CRCW0603-e3-IPC_B 74.828,93.294 r0 bottom
RLED6 "430" FP-CRCW0603-e3-IPC_B 33.35,93.396 r0 bottom
SW1 "B3U-1000P" OMRON-B3U-1000_V -15.773,6.807 r0 top
SW2 "B3U-1000P" OMRON-B3U-1000_V -31.977,5.969 r0 top
SW3 "TS04-66-43-BK-100-SMT" SOP127P600-8N 78.943,78.359 r180 top
U1 "STM32F103RET6" STM-LQFP64_N 21.641,66.904 r45 top
U2 "LT1616ES6#TRMPBF" LT-S6-6-SOT-23_M 43.104,13.005 r0 top
U3 "LT1616ES6#TRMPBF" LT-S6-6-SOT-23_M 59.715,13.005 r0 top
U7 "LT1616ES6#TRMPBF" LT-S6-6-SOT-23_M 9.988,13.274 r0 top
U8 "LT1616ES6#TRMPBF" LT-S6-6-SOT-23_M 26.619,13.462 r0 top
U18 "LP5907SNX-3.3" TI-DQN4-480X480TP_V 113.868,91.161 r90 top
U22 "LTC4231IUD-2#TRPBF" FP-UD-12-05-08-1855-IPC_A 152.484,34.273 r90 top
U23 "INA219AIDCNR" FP-DCN0008A-IPC_A 137.167,34.351 r180 top
U24 "LTC4231IUD-2#TRPBF" FP-UD-12-05-08-1855-IPC_A 149.217,60.841 r90 top
U25 "INA219AIDCNR" FP-DCN0008A-IPC_A 135.07,61.183 r180 top
U26 "LTC4231IUD-2#TRPBF" FP-UD-12-05-08-1855-IPC_A 115.045,33.663 r90 top
U27 "INA219AIDCNR" FP-DCN0008A-IPC_A 102.946,39.014 r180 top
U28 "LTC4231IUD-2#TRPBF" FP-UD-12-05-08-1855-IPC_A 114.384,60.206 r90 top
U29 "INA219AIDCNR" FP-DCN0008A-IPC_A 101.694,60.868 r180 top
U30 "LTC4231IUD-2#TRPBF" FP-UD-12-05-08-1855-IPC_A 65.557,43.104 r90 bottom
U31 "INA219AIDCNR" FP-DCN0008A-IPC_A 81.001,42.342 r0 bottom
U32 "LTC4231IUD-2#TRPBF" FP-UD-12-05-08-1855-IPC_A 76.36,65.337 r270 bottom
U33 "INA219AIDCNR" FP-DCN0008A-IPC_A 61.493,66.472 r180 bottom
U34 "MAX6746KA29+T" FP-K8-5-IPC_C -10.744,3.581 r0 top
U35 "MAX6746KA29+T" FP-K8-5-IPC_C -27.051,3.353 r0 top
U36 "SN74AUP1G08QDCKRQ1" DCK0005A_N -6.706,7.036 r90 top
U37 "SN74AUP1G08QDCKRQ1" DCK0005A_N -23.546,6.858 r90 top
U38 "LTC4304CMS#PBF" LTC4304CMS#PBF-Footprint-1 139.395,88.748 r90 top
U39 "74AC14MTCX" FP-948G-MFG 138.324,54.87 r180 top
U40 "SN74LVC1G373DCKR" DCK0006A_M 141.402,41.631 r180 top
U41 "ISL3259EIRZ" ISL3259EIRZ-Footprint-1 171.602,76.124 r0 top
U50 "LM2622MMX-ADJ/NOPB" DGK0008A_M 78.435,25.451 r0 top
U51 "LM2622MMX-ADJ/NOPB" DGK0008A_M 77.648,12.497 r180 top
U60 "LTC4231IUD-2#TRPBF" FP-UD-12-05-08-1855-IPC_A 118.999,2.946 r90 top
U61 "INA219AIDCNR" FP-DCN0008A-IPC_A 101.905,2.845 r180 top
VBATT "TPAD6R" TP06R 117.932,78.334 r90 top
VBATTP "TPAD6R" TP06R 152.527,78.232 r90 top
VBATTS "TPAD6R" TP06R 134.976,78.435 r90 top
Y1 "ABS07-166-32.768KHZ-T" EPSON-FC-135_V 166.497,91.008 r0 top

## Footprints (in the part's own frame and the unit in brackets; to place one, negate y for a bottom-side part, rotate by r counter-clockwise, add the part's x,y. Pads: shape width x height; smd on the part's side, far side on the other; paste and mask are expansions set on the pad)
1N4148WX-TP-Footprint-1 [mm]
  rect 1.05x0.5 smd: 1(-1.185,0) 2(1.185,0)
  silkscreen extent -2.4,-0.62 0.85,0.62, body extent -1.25,-0.64 1.25,0.64, height 1.17
22-28-4036-Footprint-1 [mil]
  round 60 hole 30: 1(-65,-25) 2(35,-25) 3(135,-25)
  silkscreen extent -110,-70 180,20
CAPC0402(1005)60_L [mm] "Chip Capacitor, Body 1.0x0.5mm, Height 0.6mm, IPC High Density"
  rrect25% 0.5x0.55 smd: 1(-0.45,0) 2(0.45,0)
  silkscreen extent 0,-0.2 0,0.2, body extent -0.5,-0.25 0.5,0.25, height 0.6
CAPC0603(1608)100_L [mm] "Chip Capacitor, Body 1.6x0.8mm, Height 1.0mm, IPC High Density"
  rrect25% 0.66x0.76 smd: 1(-0.7,0) 2(0.7,0)
  silkscreen extent 0,-0.3 0,0.3, body extent -0.8,-0.4 0.8,0.4, height 0.95
CAPC1608X90X35ML15T15 [mm] "Chip Capacitor, 2-Leads, Body 1.75x0.95mm, IPC Low Density"
  rect 1x1.1 smd: 1(-0.725,0) 2(0.725,0)
  body extent -0.87,-0.48 0.87,0.48, height 0.9
CAPC1608X90X40LL10T20 [mm] "Chip Capacitor, 2-Leads, Body 1.70x0.90mm, IPC High Density"
  rect 0.85x0.85 smd: 1(-0.575,0) 2(0.575,0)
  body extent -0.85,-0.45 0.85,0.45, height 0.9
CAPC1608X94X35NL15T15 [mm] "Chip Capacitor, 2-Leads, Body 1.75x0.96mm, IPC Medium Density"
  rect 1.05x1 smd: 1(-0.75,0) 2(0.75,0)
  body extent -0.87,-0.48 0.87,0.48, height 0.94
DCK0005A_N [mm] "SOT23, 5-Leads, Body 2.15x1.4mm, Pitch 0.65mm, IPC Medium Density"
  rrect25% 0.85x0.4 smd: 1(-1.125,0.65) 2(-1.125,0) 3(-1.125,-0.65) 4(1.125,-0.65) 5(1.125,0.65)
  silkscreen extent -1.25,-1.1 0.3,1.52, body extent -1.14,-1 1.14,1, height 0.94
DCK0006A_M [mm] "SOT23, 6-Leads, Body 2.15x1.4mm, Pitch 0.65mm, IPC Low Density"
  rrect22% 1.05x0.45 smd: 1(-1.225,0.65) 2(-1.225,0) 3(-1.225,-0.65) 4(1.225,-0.65) 5(1.225,0) 6(1.225,0.65)
  silkscreen extent -1.35,-1.1 0.3,1.55, body extent -1.14,-1 1.14,1, height 0.94
DGK0008A_M [mm] "TSOP, 8-Leads, Body 3.1x3.1mm, Pitch 0.65mm, IPC Low Density"
  rrect22% 1.55x0.45 smd: 1(-2.325,0.975) 2(-2.325,0.325) 3(-2.325,-0.325) 4(-2.325,-0.975) 5(2.325,-0.975) 6(2.325,-0.325) 7(2.325,0.325) 8(2.325,0.975)
  silkscreen extent -2.45,-1.55 1.15,1.92, body extent -2.45,-1.5 2.45,1.5, height 0.94
EPSON-FC-135_V [mm] "SMD, 2-Leads, Body 3.2x1.5mm"
  rrect20% 1x1.8 smd: 1(-1.25,0) 2(1.25,0)
  silkscreen extent -0.35,-0.75 0.35,0.75, body extent -1.6,-0.75 1.6,0.75, height 0.9
FP-425-04-MFG [mil]
  rect 36x48 smd paste+0 mask+0: 1(-64.5,0) 2(64.5,0)
  silkscreen extent -110,-35 32,35, body extent -86,-39 86,39, height 10
FP-502-01-MFG [mm]
  rect 0.48x0.4 smd paste+0 mask+0: 1(-0.66,0) 2(0.66,0)
  silkscreen extent -1.62,-0.45 0.05,0.45, body extent -1,-0.55 1,0.55, height 0.25
FP-948G-MFG [mm]
  rect 1.26x0.36 smd paste+0 mask+0: 1(-2.9,1.95) 2(-2.9,1.3) 3(-2.9,0.65) 4(-2.9,0) 5(-2.9,-0.65) 6(-2.9,-1.3) 7(-2.9,-1.95) 8(2.9,-1.95) 9(2.9,-1.3) 10(2.9,-0.65) 11(2.9,0) 12(2.9,0.65) 13(2.9,1.3) 14(2.9,1.95)
  silkscreen extent -4.23,-2.55 2.25,2.55, body extent -3.63,-2.8 3.63,2.8, height 0.25
FP-C0402-BB-MFG [mm]
  rect 0.52x0.52 smd paste+0 mask+0: 1(-0.4,0) 2(0.4,0)
  silkscreen extent -0.5,-0.64 0.5,0.64, body extent -0.8,-0.4 0.8,0.4, height 0.25
FP-C0603-CJ-MFG#1 [mm]
  rect 0.85x0.9 smd paste+0 mask+0: 1(-0.65,0) 2(0.65,0)
  silkscreen extent -0.8,-0.85 0.8,0.85, body extent -1.2,-0.6 1.2,0.6, height 0.25
FP-C0603-CJ-MFG#2 [mm]
  rect 0.85x0.9 smd paste+0 mask+0: 2(0.65,0) 5V_Primary(-0.65,0)
  silkscreen extent -0.8,-0.85 0.8,0.85, body extent -1.2,-0.6 1.2,0.6, height 0.25
FP-C0603-CJ-MFG#3 [mm]
  rect 0.85x0.9 smd paste+0 mask+0: 2(0.65,0) ""(-0.65,0)
  silkscreen extent -0.8,-0.85 0.8,0.85, body extent -1.2,-0.6 1.2,0.6, height 0.25
FP-C0805C-DN-IPC_A [mm]
  rect 1.505x1.556 smd paste+0 mask+0: 1(-0.901,0) 2(0.901,0)
  silkscreen extent -1.65,-1.18 1.65,1.18, body extent -2.15,-1.28 2.15,1.28, height 0.25
FP-CC0201-BA-IPC_A [mm]
  rect 0.554x0.463 smd paste+0 mask+0: 1(-0.354,0) 2(0.354,0)
  silkscreen extent -0.63,-0.63 0.63,0.63, body extent -0.83,-0.43 0.83,0.43, height 0.25
FP-CL10-IPC_B [mm]
  rect 0.958x0.912 smd paste+0 mask+0: 1(-0.727,0) 2(0.727,0)
  silkscreen extent -1.21,-0.86 1.21,0.86, body extent -1.46,-0.71 1.46,0.71, height 0.25
FP-CL31-IPC_A [mm]
  rect 1.505x1.858 smd paste+0 mask+0: 1(-1.476,0) 2(1.476,0)
  silkscreen extent -0.42,-0.93 0.42,0.93, body extent -2.73,-1.43 2.73,1.43, height 0.25
FP-CR0603-IPC_A [mm]
  rect 1.158x1.012 smd paste+0 mask+0: 1(-0.827,0) 2(0.827,0)
  silkscreen extent -1.41,-0.91 1.41,0.91, body extent -0.8,-0.4 0.8,0.4, height 0.55
FP-CR0805-IPC_A [mm]
  rect 1.258x1.462 smd paste+0 mask+0: 1(-0.977,0) 2(0.977,0)
  silkscreen extent -1.61,-1.13 1.61,1.13, body extent -2.11,-1.23 2.11,1.23, height 0.25
FP-CRCW0603-e3-IPC_B [mm]
  rect 0.935x0.962 smd paste+0 mask+0: 1(-0.715,0) 2(0.715,0)
  silkscreen extent -0.75,-0.95 0.75,0.9, body extent -0.77,-0.43 0.77,0.43, height 0.5
FP-CRCW0603-e3-IPC_C [mm]
  rect 0.735x0.862 smd paste+0 mask+0: 1(-0.615,0) 2(0.615,0)
  silkscreen extent -0.75,-0.85 0.75,0.85, body extent -1.08,-0.58 1.08,0.58, height 0.25
FP-CRCW1206-e3-IPC_A [mm]
  rect 1.356x1.858 smd paste+0 mask+0: 1(-1.526,0) 2(1.526,0)
  silkscreen extent -0.47,-0.8 0.47,0.8, body extent -2.7,-1.43 2.7,1.43, height 0.25
FP-CRCW1210-e3-IPC_C [mm]
  rect 1.005x2.606 smd paste+0 mask+0: 1(-1.351,0) 2(1.351,0)
  silkscreen extent -0.47,-1.25 0.47,1.25, body extent -1.95,-1.45 1.95,1.45, height 0.25
FP-CSR1206-IPC_C [mm]
  rect 0.956x1.608 smd paste+0 mask+0: 1(-1.276,0) 2(1.276,0)
  silkscreen extent -0.5,-0.85 0.5,0.85, body extent -1.85,-0.95 1.85,0.95, height 0.25
FP-DCN0008A-IPC_A [mm]
  rect 1.805x0.495 smd paste+0 mask+0: 1(-1.15,0.975)
  rrect100% 1.805x0.495 smd paste+0 mask+0: 2(-1.15,0.325) 3(-1.15,-0.325) 4(-1.15,-0.975) 5(1.15,-0.975) 6(1.15,-0.325) 7(1.15,0.325) 8(1.15,0.975)
  silkscreen extent -2.83,-1.7 1.4,1.7, body extent -2.55,-1.95 2.55,1.95, height 0.25
FP-ERJ3EK-MFG [mm]
  rect 0.65x0.9 smd paste+0 mask+0: 1(-0.725,0) 2(0.725,0)
  silkscreen extent 0,-0.48 0,0.48, body extent -1.15,-0.58 1.15,0.58, height 0.25
FP-ESR01-IPC_C [mm]
  rect 0.466x0.472 smd paste+0 mask+0: 1(-0.403,0) 2(0.403,0)
  silkscreen extent -0.64,-0.67 0.64,0.67, body extent -0.74,-0.38 0.74,0.38, height 0.25
FP-FTSH-105-01-L-DV-K-P-T-MFG [mm]
  rect 0.74x2.79 smd paste+0 mask+0: 1(-2.54,-2.035) 2(-2.54,2.035) 3(-1.27,-2.035) 4(-1.27,2.035) 5(0,-2.035) 6(0,2.035) 7(1.27,-2.035) 8(1.27,2.035) 9(2.54,-2.035) 10(2.54,2.035)
  silkscreen extent -3.24,-4.11 3.24,0.27, body extent -3.34,-3.53 3.34,3.53, height 0.25
FP-GRM033-0_03-IPC_A [mm]
  rect 0.554x0.463 smd paste+0 mask+0: 1(-0.354,0) 2(0.354,0)
  silkscreen extent -0.63,-0.63 0.63,0.63, body extent -0.83,-0.43 0.83,0.43, height 0.25
FP-HSMS-C150-MFG [mm]
  rect 1.5x1.5 smd paste+0 mask+0: 1(-1.75,0) 2(1.75,0)
  silkscreen extent -3.25,-0.85 0.62,0.85, body extent -2.6,-0.95 2.6,0.95, height 0.25
FP-K8-5-IPC_C [mm]
  rect 1.205x0.415 smd paste+0 mask+0: 1(-1.05,0.975)
  rrect100% 1.205x0.415 smd paste+0 mask+0: 2(-1.05,0.325) 3(-1.05,-0.325) 4(-1.05,-0.975) 5(1.05,-0.975) 6(1.05,-0.325) 7(1.05,0.325) 8(1.05,0.975)
  silkscreen extent -2.28,-1.45 0.05,1.45, body extent -1.75,-1.55 1.75,1.55, height 0.25
FP-LQH43CN_03-MFG [mm]
  round 1.603 smd paste+0 mask+0: 1(-1.641,0.047) 2(1.641,-0.047)
  Top Layer region: 3.75,0.75 2.25,0.75 2.25,1.5 0.75,1.5 0.75,-1.5 2.25,-1.5 2.25,-0.75 3.75,-0.75 3.75,0.75
  Top Layer region: -3.75,0.75 -2.25,0.75 -2.25,1.5 -0.75,1.5 -0.75,-1.5 -2.25,-1.5 -2.25,-0.75 -3.75,-0.75 -3.75,0.75
  silkscreen extent -0.38,-1.7 0.38,1.7, body extent -3.85,-1.8 3.85,1.8, height 0.25
FP-MLZ1608-IPC_C [mm]
  rect 0.806x0.858 smd paste+0 mask+0: 1(-0.626,0) 2(0.626,0)
  silkscreen extent -1.03,-0.87 1.03,0.87, body extent -1.13,-0.58 1.13,0.58, height 0.25
FP-PTN0603-IPC_B [mm]
  rect 1.017x0.949 smd paste+0 mask+0: 1(-0.735,0) 2(0.735,0)
  silkscreen extent -1.24,-0.87 1.24,0.87, body extent -1.49,-0.72 1.49,0.72, height 0.25
FP-RT1206-IPC_C [mm]
  rect 0.858x1.612 smd paste+0 mask+0: 1(-1.327,0) 2(1.327,0)
  silkscreen extent -0.52,-0.8 0.52,0.8, body extent -1.86,-0.95 1.86,0.95, height 0.25
FP-UD-12-05-08-1855-IPC_A [mm]
  rect 0.931x0.242 smd paste+0 mask+0: 1(-1.491,0.5)
  rrect100% 0.931x0.242 smd paste+0 mask+0: 2(-1.491,0) 3(-1.491,-0.5) 7(1.491,-0.5) 8(1.491,0) 9(1.491,0.5)
  rrect100% 0.242x0.931 smd paste+0 mask+0: 4(-0.5,-1.491) 5(0,-1.491) 6(0.5,-1.491) 10(0.5,1.491) 11(0,1.491) 12(-0.5,1.491)
  rect 1.75x1.75 smd paste-1000 mask+0: 13(0,0)
  silkscreen extent -2.88,-1.5 1.5,1.5, body extent -2.46,-2.46 2.46,2.46, height 0.25
INDM3532X15N [mm] "Molded Inductor, 2-Leads, Body 3.50x3.20mm, IPC Medium Density"
  rect 1.1x1.45 smd: 1(-1.5,0) 2(1.5,0)
  silkscreen extent -1.9,-1.7 1.9,1.7, body extent -1.9,-1.7 1.9,1.7, height 1.5
ISL3259EIRZ-Footprint-1 [mm]
  rect 1.525x0.65 smd: 1(2.495,5.207) 2(2.495,3.937) 3(2.495,2.667) 4(2.495,1.397) 5(7.919,1.397) 6(7.919,2.667) 7(7.919,3.937) 8(7.919,5.207)
  silkscreen extent 1.73,0.85 6.81,5.88, body extent 2.21,0.85 8.21,5.75, height 1.75
LT-S6-6-SOT-23_M [mm] "SOT23, 6-Leads, Body 3x1.75mm, Pitch 0.95mm, IPC Low Density"
  rect 1.3x0.7 smd: 1(-1.2,0.95) 2(-1.2,0) 3(-1.2,-0.95) 4(1.2,-0.95) 5(1.2,0) 6(1.2,0.95)
  silkscreen extent -1.32,-1.5 0.15,1.97, body extent -0.87,-1.5 0.87,1.5, height 1.45
LTC4304CMS#PBF-Footprint-1 [mil]
  rect 55x11 smd: 1(-86,39.4) 2(-86,19.7) 3(-86,0) 4(-86,-19.7) 5(-86,-39.4) 6(86,-39.4) 7(86,-19.7) 8(86,0) 9(86,19.7) 10(86,39.4)
  silkscreen extent -66,-66 134,66
OMRON-B3U-1000_V [mm] "SMD, 2-Leads, Body 3x2.5mm"
  rect 0.8x1.7 smd: 1(-1.7,0) 2(1.7,0)
  silkscreen extent -2.77,-1.25 1.5,1.25, body extent -1.5,-1.25 1.5,1.25, height 1.75
ONSC-SOD-323-2-477-02_V [mm] "SOD, 2-Leads, Body 1.7x1.25mm"
  rect 0.63x0.83 smd: 1(-1.115,0) 2(1.115,0)
  silkscreen extent -1.24,-0.67 0.4,1.09, body extent -0.85,-0.63 0.85,0.63, height 1.06
RESC0402(1005)_L [mm] "Chip Resistor, Body 1.0x0.5mm, IPC High Density"
  rrect25% 0.5x0.55 smd: 1(-0.45,0) 2(0.45,0)
  silkscreen extent 0,-0.2 0,0.2, body extent -0.5,-0.25 0.5,0.25, height 0.3
RESC0603(1608)_L [mm] "Chip Resistor, Body 1.6x0.8mm, IPC High Density"
  rrect25% 0.66x0.76 smd: 1(-0.7,0) 2(0.7,0)
  silkscreen extent 0,-0.3 0,0.3, body extent -0.8,-0.4 0.8,0.4, height 0.45
RESC0603X26X15NL03T05 [mm] "Chip Resistor, 2-Leads, Body 0.60x0.30mm, IPC Medium Density"
  rect 0.45x0.35 smd: 1(-0.325,0) 2(0.325,0)
  body extent -0.32,-0.16 0.32,0.17, height 0.26
RESC0805(2012)_L [mm] "Chip Resistor, Body 2.0x1.3mm, IPC High Density"
  rrect25% 0.76x1.3 smd: 1(-0.9,0) 2(0.89,0)
  silkscreen extent -0.3,-0.55 0.3,0.55, body extent -1,-0.62 1,0.63, height 0.6
RESC1005X40X25ML05T05 [mm] "Chip Resistor, 2-Leads, Body 1.05x0.55mm, IPC Low Density"
  rect 0.65x0.65 smd: 1(-0.5,0) 2(0.5,0)
  body extent -0.53,-0.28 0.53,0.28, height 0.4
RESC1005X40X25NL05T10 [mm] "Chip Resistor, 2-Leads, Body 1.00x0.50mm, IPC Medium Density"
  rect 0.6x0.55 smd: 1(-0.425,0) 2(0.425,0)
  body extent -0.53,-0.27 0.53,0.28, height 0.4
RESC1608X55X25ML10T15 [mm] "Chip Resistor, 2-Leads, Body 1.70x0.90mm, IPC Low Density"
  rect 0.8x1 smd: 1(-0.75,0) 2(0.75,0)
  body extent -0.85,-0.45 0.85,0.45, height 0.55
RESC1608X55X30NL20T20 [mm] "Chip Resistor, 2-Leads, Body 1.60x0.80mm, IPC Medium Density"
  rect 0.9x1 smd: 1(-0.65,0) 2(0.65,0)
  body extent -0.9,-0.5 0.9,0.5, height 0.55
RESC1609X50X30LL10T20 [mm] "Chip Resistor, 2-Leads, Body 1.55x0.85mm, IPC High Density"
  rect 0.7x0.85 smd: 1(-0.575,0) 2(0.575,0)
  body extent -0.82,-0.48 0.82,0.48, height 0.5
RESC1609X50X30NL8T20 [mm] "Chip Resistor, 2-Leads, Body 1.65x0.95mm, IPC Medium Density"
  rect 0.8x0.95 smd: 1(-0.65,0) 2(0.65,0)
  body extent -0.82,-0.48 0.82,0.48, height 0.5
RESC3216X60X45ML15T20 [mm] "Chip Resistor, 2-Leads, Body 3.3x1.75mm, IPC Low Density"
  rect 1.35x1.85 smd: 1(-1.525,0) 2(1.525,0)
  silkscreen extent -0.45,-0.82 0.45,0.82, body extent -1.65,-0.87 1.65,0.87, height 0.6
RESC3216X70X50NL05T20 [mm] "Chip Resistor, 2-Leads, Body 3.20x1.60mm, IPC Medium Density"
  rect 1.1x1.65 smd: 1(-1.425,0) 2(1.425,0)
  silkscreen extent -0.5,-0.72 0.5,0.72, body extent -1.63,-0.82 1.62,0.82, height 0.7
SI5418DU-T1-GE3-Footprint-1 [mm]
  rect 0.3x0.2 smd: 1(-0.721,-0.723) 2(-0.071,-0.723) 3(0.579,-0.723) 6(0.579,0.977) 7(-0.071,0.977) 8(-0.721,0.977)
  rect 0.3x0.35 smd: 4(1.229,-0.648) 5(1.229,0.902)
  rect 0.25x0.5 smd: 9(1.354,0.127)
  rect 1.87x1.5 smd: 10(-0.161,0.127)
  silkscreen extent -0.77,-1.37 -0.67,-1.27
SMTC-SSQ-126-22-X-D [mm] "SQ Post Socket, 2x26 Pins, Vertical, 2.54mm Pitch, Female"
  rect 1.55x1.55 hole 1.02: 1(0,0)
  round 1.55 hole 1.02: 2(0,-2.54) 3(2.54,0) 4(2.54,-2.54) 5(5.08,0) 6(5.08,-2.54) 7(7.62,0) 8(7.62,-2.54) 9(10.16,0) 10(10.16,-2.54) 11(12.7,0) 12(12.7,-2.54) 13(15.24,0) 14(15.24,-2.54) 15(17.78,0) 16(17.78,-2.54) 17(20.32,0) 18(20.32,-2.54) 19(22.86,0) 20(22.86,-2.54) 21(25.4,0) 22(25.4,-2.54) 23(27.94,0) 24(27.94,-2.54) 25(30.48,0) 26(30.48,-2.54) 27(33.02,0) 28(33.02,-2.54) 29(35.56,0) 30(35.56,-2.54) 31(38.1,0) 32(38.1,-2.54) 33(40.64,0) 34(40.64,-2.54) 35(43.18,0) 36(43.18,-2.54) 37(45.72,0) 38(45.72,-2.54) 39(48.26,0) 40(48.26,-2.54) 41(50.8,0) 42(50.8,-2.54) 43(53.34,0) 44(53.34,-2.54) 45(55.88,0) 46(55.88,-2.54) 47(58.42,0) 48(58.42,-2.54) 49(60.96,0) 50(60.96,-2.54) 51(63.5,0) 52(63.5,-2.54)
  silkscreen extent -1.65,-3.74 65.15,1.21, body extent -1.52,-3.75 65.02,1.21, height 8.51
SOP127P600-8N [mm]
  rect 2.1x1.4 smd: 1(-4.55,2.25) 2(-4.55,-2.25) 3(4.572,2.25) 4(4.572,-2.25)
  silkscreen extent -4.68,-3 3.4,3.62, body extent -3,-3 3,3, height 3.5
STM-LQFP64_N [mm] "Thin QFP, 64-Leads, Body 10x10mm, Pitch 0.5mm, IPC Medium Density"
  oval 1.8x0.3 smd: 1(-5.55,3.75) 2(-5.55,3.25) 3(-5.55,2.75) 4(-5.55,2.25) 5(-5.55,1.75) 6(-5.55,1.25) 7(-5.55,0.75) 8(-5.55,0.25) 9(-5.55,-0.25) 10(-5.55,-0.75) 11(-5.55,-1.25) 12(-5.55,-1.75) 13(-5.55,-2.25) 14(-5.55,-2.75) 15(-5.55,-3.25) 16(-5.55,-3.75) 33(5.55,-3.75) 34(5.55,-3.25) 35(5.55,-2.75) 36(5.55,-2.25) 37(5.55,-1.75) 38(5.55,-1.25) 39(5.55,-0.75) 40(5.55,-0.25) 41(5.55,0.25) 42(5.55,0.75) 43(5.55,1.25) 44(5.55,1.75) 45(5.55,2.25) 46(5.55,2.75) 47(5.55,3.25) 48(5.55,3.75)
  oval 0.3x1.8 smd: 17(-3.75,-5.55) 18(-3.25,-5.55) 19(-2.75,-5.55) 20(-2.25,-5.55) 21(-1.75,-5.55) 22(-1.25,-5.55) 23(-0.75,-5.55) 24(-0.25,-5.55) 25(0.25,-5.55) 26(0.75,-5.55) 27(1.25,-5.55) 28(1.75,-5.55) 29(2.25,-5.55) 30(2.75,-5.55) 31(3.25,-5.55) 32(3.75,-5.55) 49(3.75,5.55) 50(3.25,5.55) 51(2.75,5.55) 52(2.25,5.55) 53(1.75,5.55) 54(1.25,5.55) 55(0.75,5.55) 56(0.25,5.55) 57(-0.25,5.55) 58(-0.75,5.55) 59(-1.25,5.55) 60(-1.75,5.55) 61(-2.25,5.55) 62(-2.75,5.55) 63(-3.25,5.55) 64(-3.75,5.55)
  silkscreen extent -5.67,-4.25 4.25,4.57, body extent -5,-5 5,5, height 1.6
TI-DQN4-480X480TP_V [mm] "SON, 4-Leads, Body 1x1mm, Pitch 0.65mm, Thermal Pad 0.5x0.5mm"
  round 0.2 smd mask+0: 1(-0.5,0.325) 2(-0.5,-0.325) 3(0.5,-0.325) 4(0.5,0.325)
  rrect25% 0.48x0.48 smd rot 45 paste+0.005: 5(0,0)
  Top Layer region: -0.275,-0.45 -0.275,-0.375 -0.425,-0.225 -0.6,-0.225 -0.625,-0.25 -0.625,-0.425 -0.6,-0.45
  Top Layer region: -0.225,0.45 -0.225,0.425 -0.425,0.225 -0.6,0.225 -0.625,0.25 -0.625,0.425 -0.6,0.45
  Top Layer region: 0.275,0.45 0.275,0.375 0.425,0.225 0.6,0.225 0.625,0.25 0.625,0.425 0.6,0.45
  Top Layer region: 0.275,-0.45 0.275,-0.375 0.425,-0.225 0.6,-0.225 0.625,-0.25 0.625,-0.425 0.6,-0.45
  silkscreen extent -0.9,-0.8 0.9,0.8, body extent -0.5,-0.5 0.5,0.5, height 0.35
TP06R [mm] "Testpoint, round, d=0.6mm"
  round 0.6 smd paste-1: 1(0,0)
Vishay_S17-0173-SINGLE_MFG [mil]
  rect 50x24 smd paste+0 mask+0: 1(-105,75) 2(-105,25) 3(-105,-25) 4(-105,-75)
  round 132.13 smd paste+0 mask+0: 5-6-7-8(25.41,-2.72)
  Top Layer region: -48,77 90,77 90,87 130,87 130,63 102,63 102,37 130,37 130,13 102,13 102,-13 130,-13 130,-37 102,-37 102,-63 130,-63 130,-87 90,-87 90,-77 -48,-77
  silkscreen extent -157,-110 118,110, body extent -134,-107 134,107, height 10

## Part data
3V3 3V3P 3V3S 5V 5VP 5VS GND VBATT VBATTP VBATTS: library part CMP-00028-00002-2, "0.6mm round", Pins=1
C1 C2 C3 C4 C5 C6 C10 C11 C21 C23 C26 C28 C100 C101 C102: library part CMP-2006-03300-2, "CAP CER 0.1UF 50V X7R 0603 / C0603X104K5RACTU", Capacitance=100nF, Manufacturer=Kemet, Manufacturer Part Number=C0603X104K5RACTU, Package=C0603-CJ, Temperature="-55°C to +125°C", Temperature Characteristic=X7R, Temperature Coefficient=15%, Temperature Range High=+125°C, Temperature Range Low=-55°C, Tolerance=10%, Voltage=50V, Automotive=No, Category=Cap, ComponentLink2Description=Datasheet, ComponentLink2URL=https://content.kemet.com/datasheets/KEM_C1013_X7R_FT-CAP_SMD.pdf, Device Class L1="Passive Components", Device Class L2=Capacitors, Device Class L3="Ceramic Capacitors", Digikey Description="CAP CER 0.1UF 50V X7R 0603", Height=0.95mm, Ipc Land Pattern Name=CAPC16080X80, Lead Free=Yes, Material=Ceramic, Mouser Description="Capacitor; Ceramic; Cap 0.1uF; Tol+10%; SMT; Flexible Termination; Vol-Rtg 50V; TR", Octopart=https://octopart.com/c0603x104k5ractu-kemet-9145062, RoHS=TRUE, Voltage Rating=50V
C7 C19: library part CMP-13271-001107-1, "Cap Ceramic 1uF 25V X7R ±10% Pad SMD 0603 +125°C T/R / CL10B105KA8NFNC", Case Code (Imperial)=0603, Case Code (Metric)=1608, Dielectric=X7R, Max Operating Temperature=125°C, Min Operating Temperature=-55°C, Package Quantity=1, Tolerance=10%, Voltage Rating=25V, Capacitance=1uF, Case/Package=0603, Depth=0.8mm, Height=0.8mm, Lead Free="Lead Free", Length=0.063inch, Mount="Surface Mount", Packaging="Tape and Reel", Radiation Hardening=No, Thickness=0.035inch, Width=0.031inch
C8 C12 C24 C29: library part CMP-001-00075-4, "Chip Capacitor, 10µF +/-20%, 10V, 0603, Thickness 1 mm", Case/Package=0603, Max Operating Temperature=85°C, Min Operating Temperature=-55°C, Tolerance=10%, Voltage Rating=10V, Mounting Technology=SMT, Pins=2
C25 C27: library part CMP-13271-001107-1, "Cap Ceramic 1uF 25V X7R ±10% Pad SMD 0603 +125°C T/R", Case Code (Imperial)=0603, Case Code (Metric)=1608, Dielectric=X7R, Max Operating Temperature=125°C, Min Operating Temperature=-55°C, Package Quantity=1, Tolerance=10%, Voltage Rating=25V, Capacitance=1uF, Case/Package=0603, Depth=0.8mm, Height=0.8mm, Lead Free="Lead Free", Length=0.063inch, Mount="Surface Mount", Packaging="Tape and Reel", Radiation Hardening=No, Thickness=0.035inch, Width=0.031inch
C75 C76: library part CMP-001-00088-1, "Ceramic Capacitor, Multilayer, Ceramic, 6.3V, 10% +Tol, 10% -Tol, X5R, 15% TC, 1uF, Surface Mount, 0201", Capacitor Type=Ceramic, Case/Package=0201, Max Operating Temperature=85°C, Min Operating Temperature=-55°C, Mounting Technology="Surface Mount", Pins=2, RoHS Compliant=Yes
C77 C80 C83 C86 C89 C92 C122: library part CMP-001-00086-1, "Ceramic Capacitor, Multilayer, Ceramic, 50V, 10% +Tol, 10% -Tol, X7R, 15% TC, 0.18uF, Surface Mount, 0805", Capacitor Type=Ceramic, Case/Package=0805, Max Operating Temperature=125°C, Min Operating Temperature=-55°C, Mounting Technology="Surface Mount", Pins=2, RoHS Compliant=Yes
C78 C81 C84 C87 C90 C93 C120: library part CMP-001-00005-6, "Chip Capacitor, 1 uF, +/- 10%, 25 V, 0603 (1608 Metric)", Capacitor Type=Ceramic, Case/Package=0603, Max Operating Temperature=125°C, Min Operating Temperature=-55°C, Tolerance=10%, Voltage Rating=25V, Mounting Technology=SM, Pins=2, RoHS Compliant=True
C79 C82 C85 C88 C91 C94 C121: library part CMP-001-00004-6, "Chip Capacitor, 1 uF, +/- 10%, 16 V, 0603 (1608 Metric)", Capacitor Type=Ceramic, Case/Package=0603, Max Operating Temperature=125°C, Min Operating Temperature=-55°C, Tolerance=10%, Voltage Rating=16V, Mounting Technology=SM, Pins=2, RoHS Compliant=True
C95 C97: library part CMP-001-00056-4, "Chip Capacitor, 2,2µF +/-20%, 10V, 0402, Thickness 0.6 mm", Case/Package=0402, Max Operating Temperature=85°C, Min Operating Temperature=-55°C, Tolerance=10%, Voltage Rating=10V, Mounting Technology=SMT, Pins=2
C96 C98: library part CMP-001-00078-4, "Chip Capacitor, 1µF +/-40%, 50V, 0603, Thickness 1 mm", Case/Package=0603, Max Operating Temperature=85°C, Min Operating Temperature=-55°C, Tolerance=10%, Voltage Rating=50V, Mounting Technology=SMT, Pins=2
C99: library part CMP-001-00003-6, "Chip Capacitor, 1 uF, +/- 10%, 16 V, 0603 (1608 Metric)", Capacitor Type=Ceramic, Case/Package=0603, Max Operating Temperature=125°C, Min Operating Temperature=-55°C, Tolerance=10%, Voltage Rating=16V, Mounting Technology=SM, Pins=2, RoHS Compliant=True
C103 C104: library part CMP-2010-01302-2, "Chip Multilayer Ceramic Capacitors for General Purpose, 0201, 10pF, C0G, 30ppm/°C, 5%, 25V", Capacitance=10pF, Case Code (Imperial)=0201, Case Code (Metric)=0603, Dielectric=C0G, Max Operating Temperature=125°C, Min Operating Temperature=-55°C, Package Quantity=1, Tolerance=5%, Voltage Rating=25V, Case/Package=0201, Depth=0.3mm, Lead Free="Lead Free", Length=0.024inch, Mount="Surface Mount", Packaging="Tape and Reel", REACH SVHC="No SVHC", Series=GRM, Termination=SMD/SMT, Thickness=0.013inch, Voltage Rating (DC)=25V, Width=0.012inch
Cc Cc1: library part CMP-2008-03290-2, "CAP CER 2200PF 25V 5% NP0 0402", Capacitance="2,200 pF", Manufacturer=Kemet, Manufacturer Part Number=C0402C222J3GACTU, Package=C0402-BB, Temperature="-55°C to +125°C", Temperature Characteristic=C0G, Temperature Coefficient=15%, Temperature Range High=+125°C, Temperature Range Low=-55°C, Tolerance=0.05, Voltage Rating="25 V", Automotive=No, Category=Cap, ComponentLink2Description=Datasheet, ComponentLink2URL=https://content.kemet.com/datasheets/KEM_C1002_X7R_SMD.pdf, Device Class L1="Passive Components", Device Class L2=Capacitors, Device Class L3="Ceramic Capacitors", Digikey Description="CAP CER 2200PF 25V 5% NP0 0402", Height=0.55mm, Ipc Land Pattern Name=CAPC10050X50, Lead Free=Yes, Material=Ceramic, Mouser Description="Multilayer Ceramic Capacitors MLCC - SMD/SMT 25V 0.0022uF 5% C0G", Octopart=https://octopart.com/c0402c222j3gactu-kemet-9145102, RoHS=TRUE
Cin Cin1 Cout Cout1: library part CMP-13271-002013-1, "Cap Ceramic 22uF 16V X5R ±20% SMD 1206 +85°C Embossed T/R", Case Code (Imperial)=1206, Case Code (Metric)=3216, Dielectric=X5R, Max Operating Temperature=85°C, Min Operating Temperature=-55°C, Package Quantity=1, Tolerance=20%, Voltage=16V, Capacitance=22uF, Case/Package=1206, Depth=1.6mm, Height=0.85mm, Lead Free="Lead Free", Length=3.2mm, Mount="Surface Mount", Packaging="Tape and Reel", Radiation Hardening=No, Thickness=0.037inch, Voltage Rating=16V, Width=0.063inch
D1 D3 D5 D7 D11 D12 D52 D53 D54 D55: library part CMP-07163-000008-1, "DIODE GEN PURP 75V 200MA SOD523F", Capacitance=4pF, Forward Current=300mA, Manufacturer="ON Semiconductor", Max Junction Temp=+150°C, Max Repetitive Reverse Voltage=75V, Package=502-01, Peak Reverse Current=5uA, Reverse Voltage=100V, Temperature="-55°C to +150°C", Temperature Range Low=-55°C, Automotive=No, Category=Diode, ComponentLink2Description=Datasheet, ComponentLink2URL=https://www.onsemi.com/pub/Collateral/1N914BWT-D.pdf, Device Class L1="Discrete Semiconductors", Device Class L2=Diodes, Device Class L3="Rectifier Diodes", Digikey Description="DIODE GEN PURP 75V 200MA SOD523F", Footprint Url=https://www.onsemi.com/pub/Collateral/502-01.PDF, Height=0.7mm, Ipc Land Pattern Name=SODFL16080X60, Lead Free=Yes, Manufacturer Part Number=1N914BWT, Mouser Description="Diodes - General Purpose, Power, Switching SINGLE JUNC. 100V 4.0NS COMP", Octopart=https://octopart.com/1n914bwt-on+semiconductor-84323166, RoHS=TRUE, Temperature Range High=+150°C
D2 D4 D6 D8: library part CMP-2000-05113-2, "DIODE SCHOTTKY 30V 500MA SOD123", Average Rectified Current=500mA, Forward Voltage=430mV, Max Forward Surge Current (Ifsm)=5.5A, Max Operating Temperature=150°C, Max Repetitive Reverse Voltage (Vrrm)=30V, Max Reverse Leakage Current=130uA, Min Operating Temperature=-65°C, Package Quantity=1, Contact Plating=Tin, Current Rating=500mA, Element Configuration=Single, Forward Current=500mA, Height=1.03mm, Lead Free="Lead Free", Length=2.7mm, Max Reverse Voltage (DC)=30V, Max Surge Current=5.5A, Mount="Surface Mount", Number of Pins=2, Output Current=500mA, Packaging="Tape and Reel", Peak Non-Repetitive Surge Current=5.5A, Peak Reverse Current=130uA, Polarity=Standard, Radiation Hardening=No, REACH SVHC="No SVHC", Voltage Rating (DC)=30V, Weight=0.03g, Width=1.6mm
D38 D41 D47 D50 D56 D57 D58 D59 D60 D61 D?: library part CMP-1060-00650-1, "Zener Voltage Regulator, 300 mW, 2-Pin SOD-323, Pb-Free, Tape and Reel", Manufacturer="On Semiconductor", ComponentLink1Description="Manufacturer URL", ComponentLink1URL=http://www.onsemi.com/, ComponentLink2Description=Datasheet, ComponentLink2URL=http://www.onsemi.cn/pub_link/Collateral/MM3Z2V4T1-D.PDF, ComponentLink3Description="Package Specification", ComponentLink3URL=http://www.onsemi.com/pub_link/Collateral/477-02.PDF.1, DatasheetVersion="Rev. 9", Mounting Technology="Surface Mount", P Max (W)=0.3, PackageDescription="2-Pin SOD, Body 1.7 x 1.25 mm", PackageReference=SOD-323-2-477-02, PackageVersion="Rev. H, 03/2007", Packing="Tape and Reel", PartNumber=MM3Z3V6T1G, RoHS=Pb-Free, VZ Typ (V)=3.6
D63: library part CMP-004-00035-2, "Rectifier Diode, 1 Phase, 1 Element, 0.15A, 100V V(RRM), Silicon"